# Altium PCB Motor-35.PcbDoc
Units mm, origin at the board's own origin, x right, y up, seen from the top; angles counter-clockwise.
Board outline 35.05 x 35.13 mm, 4 copper layers (Top1, Signal2, Gnd3, Bottom4), stack 0.778 mm thick; 73 components, 65 nets, 248 pads, 132 vias.
Unrouted connection lines stored in the file: 54.
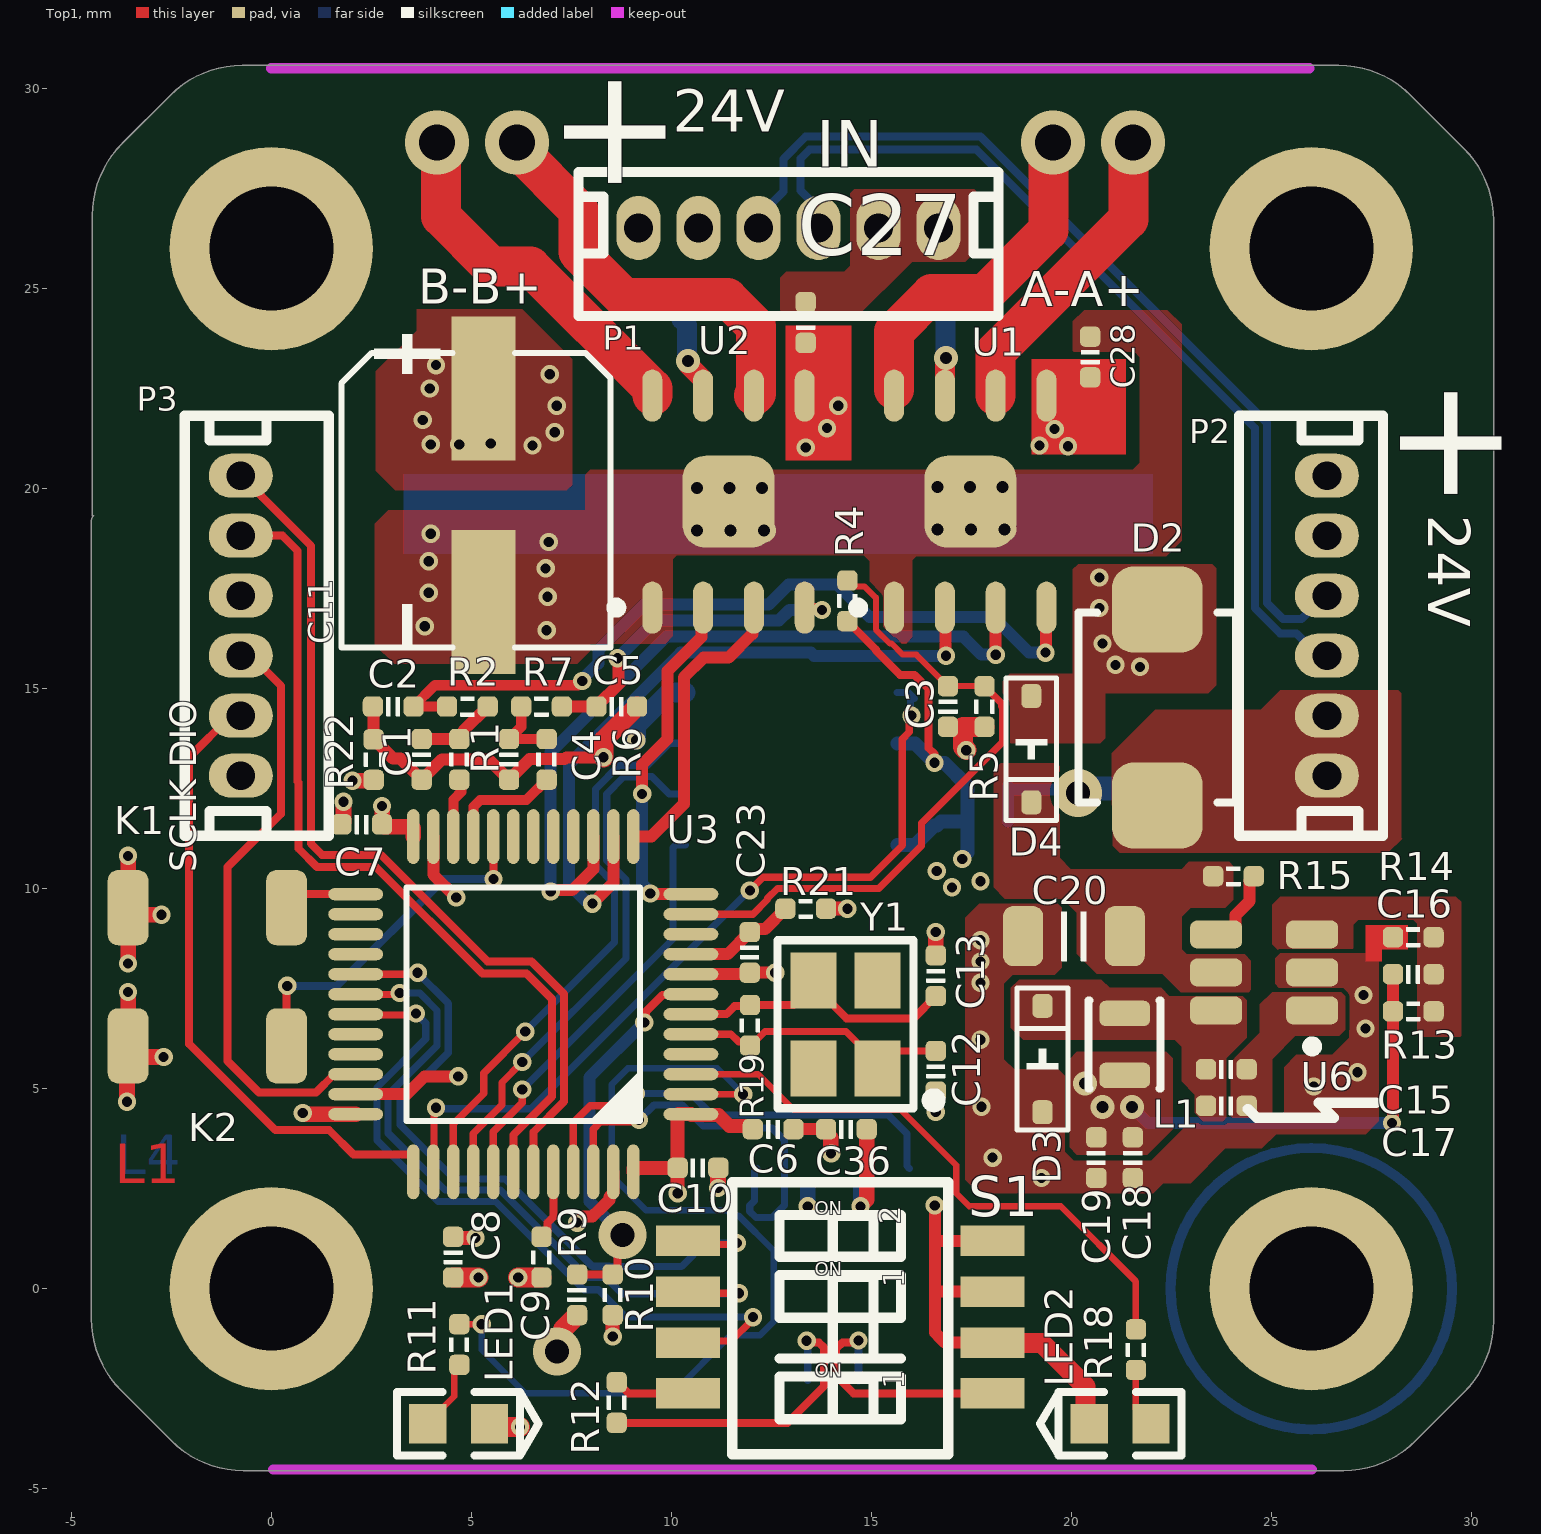
[diagram p0: Top1 view]
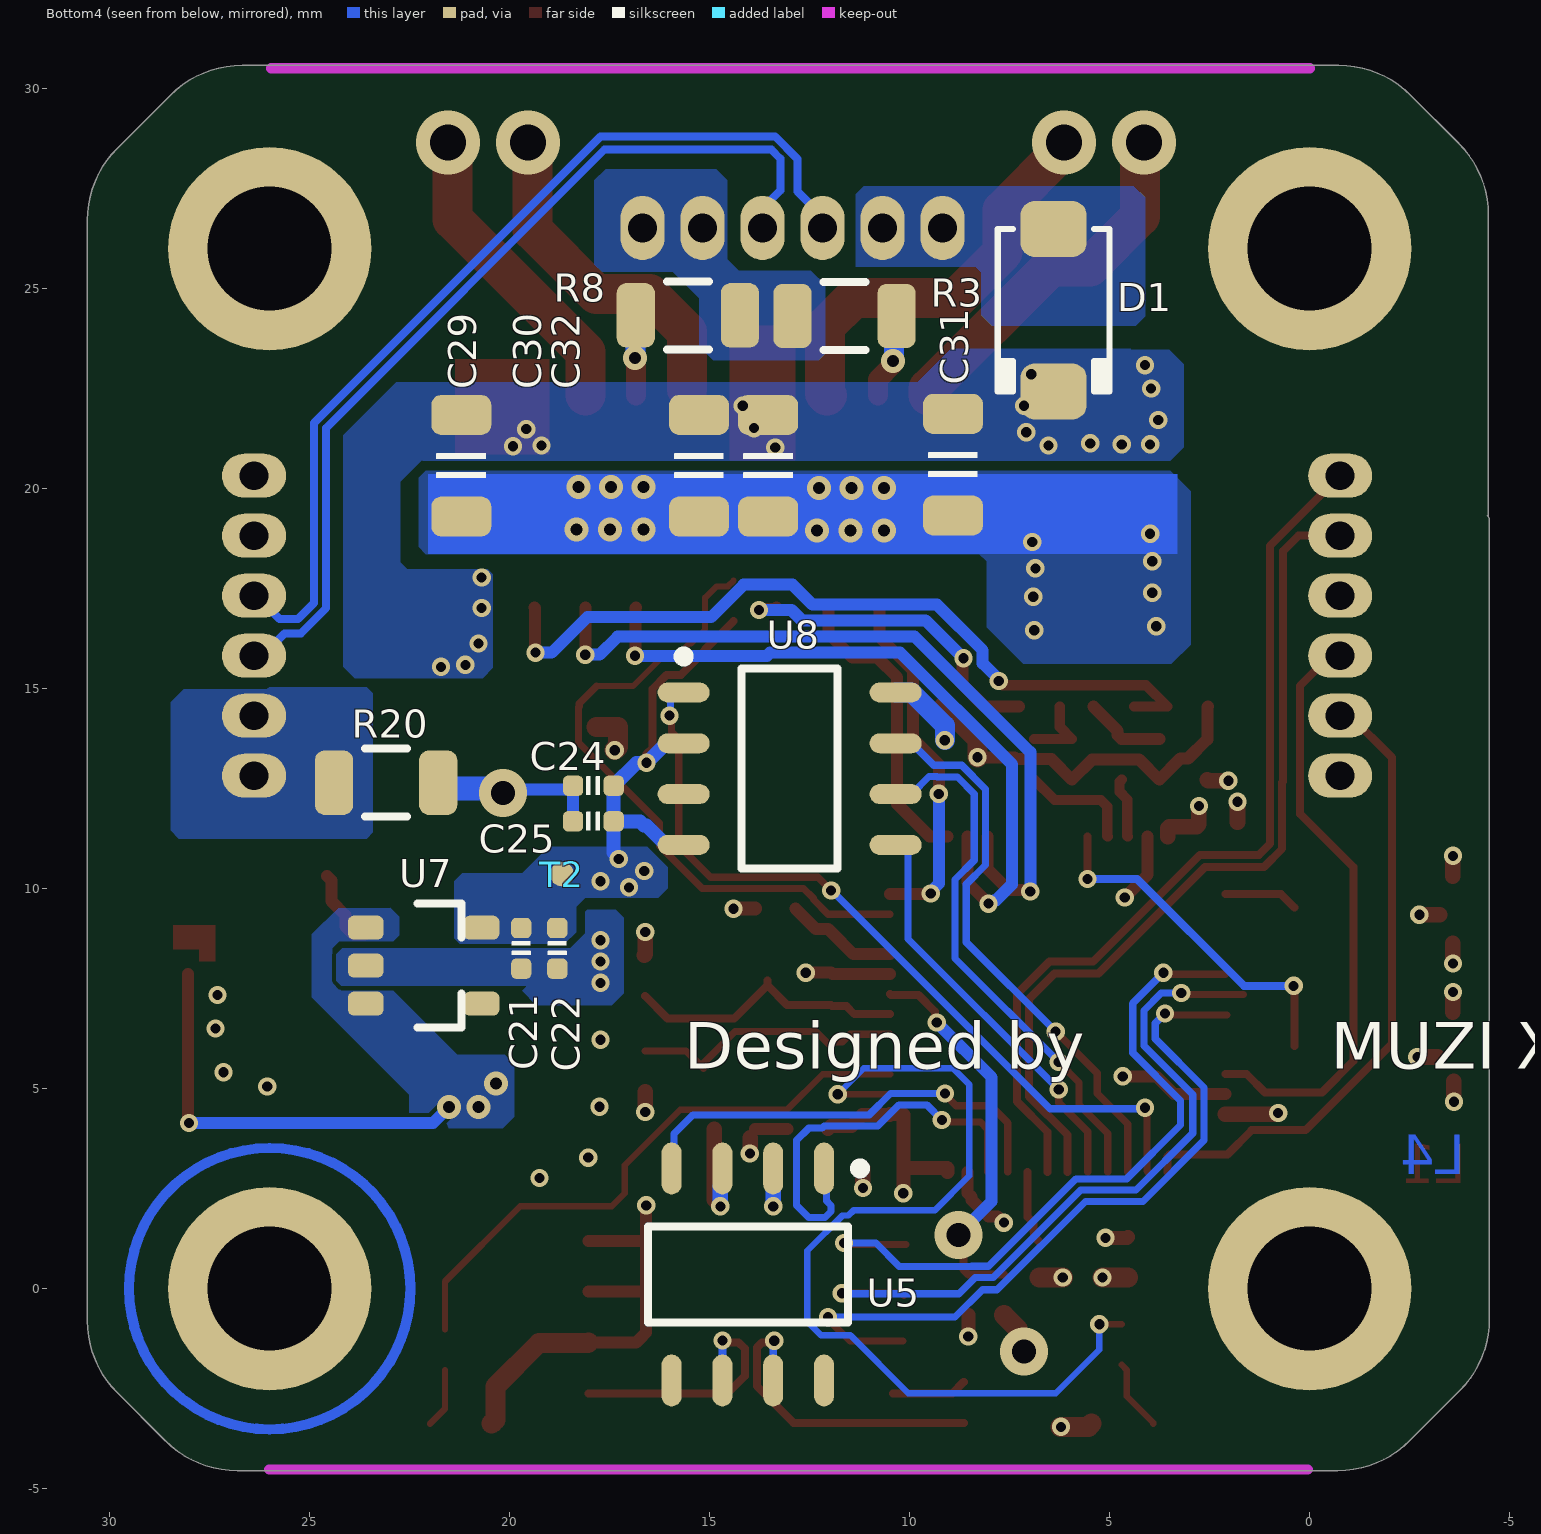
[diagram p1: Bottom4 view, seen from below]
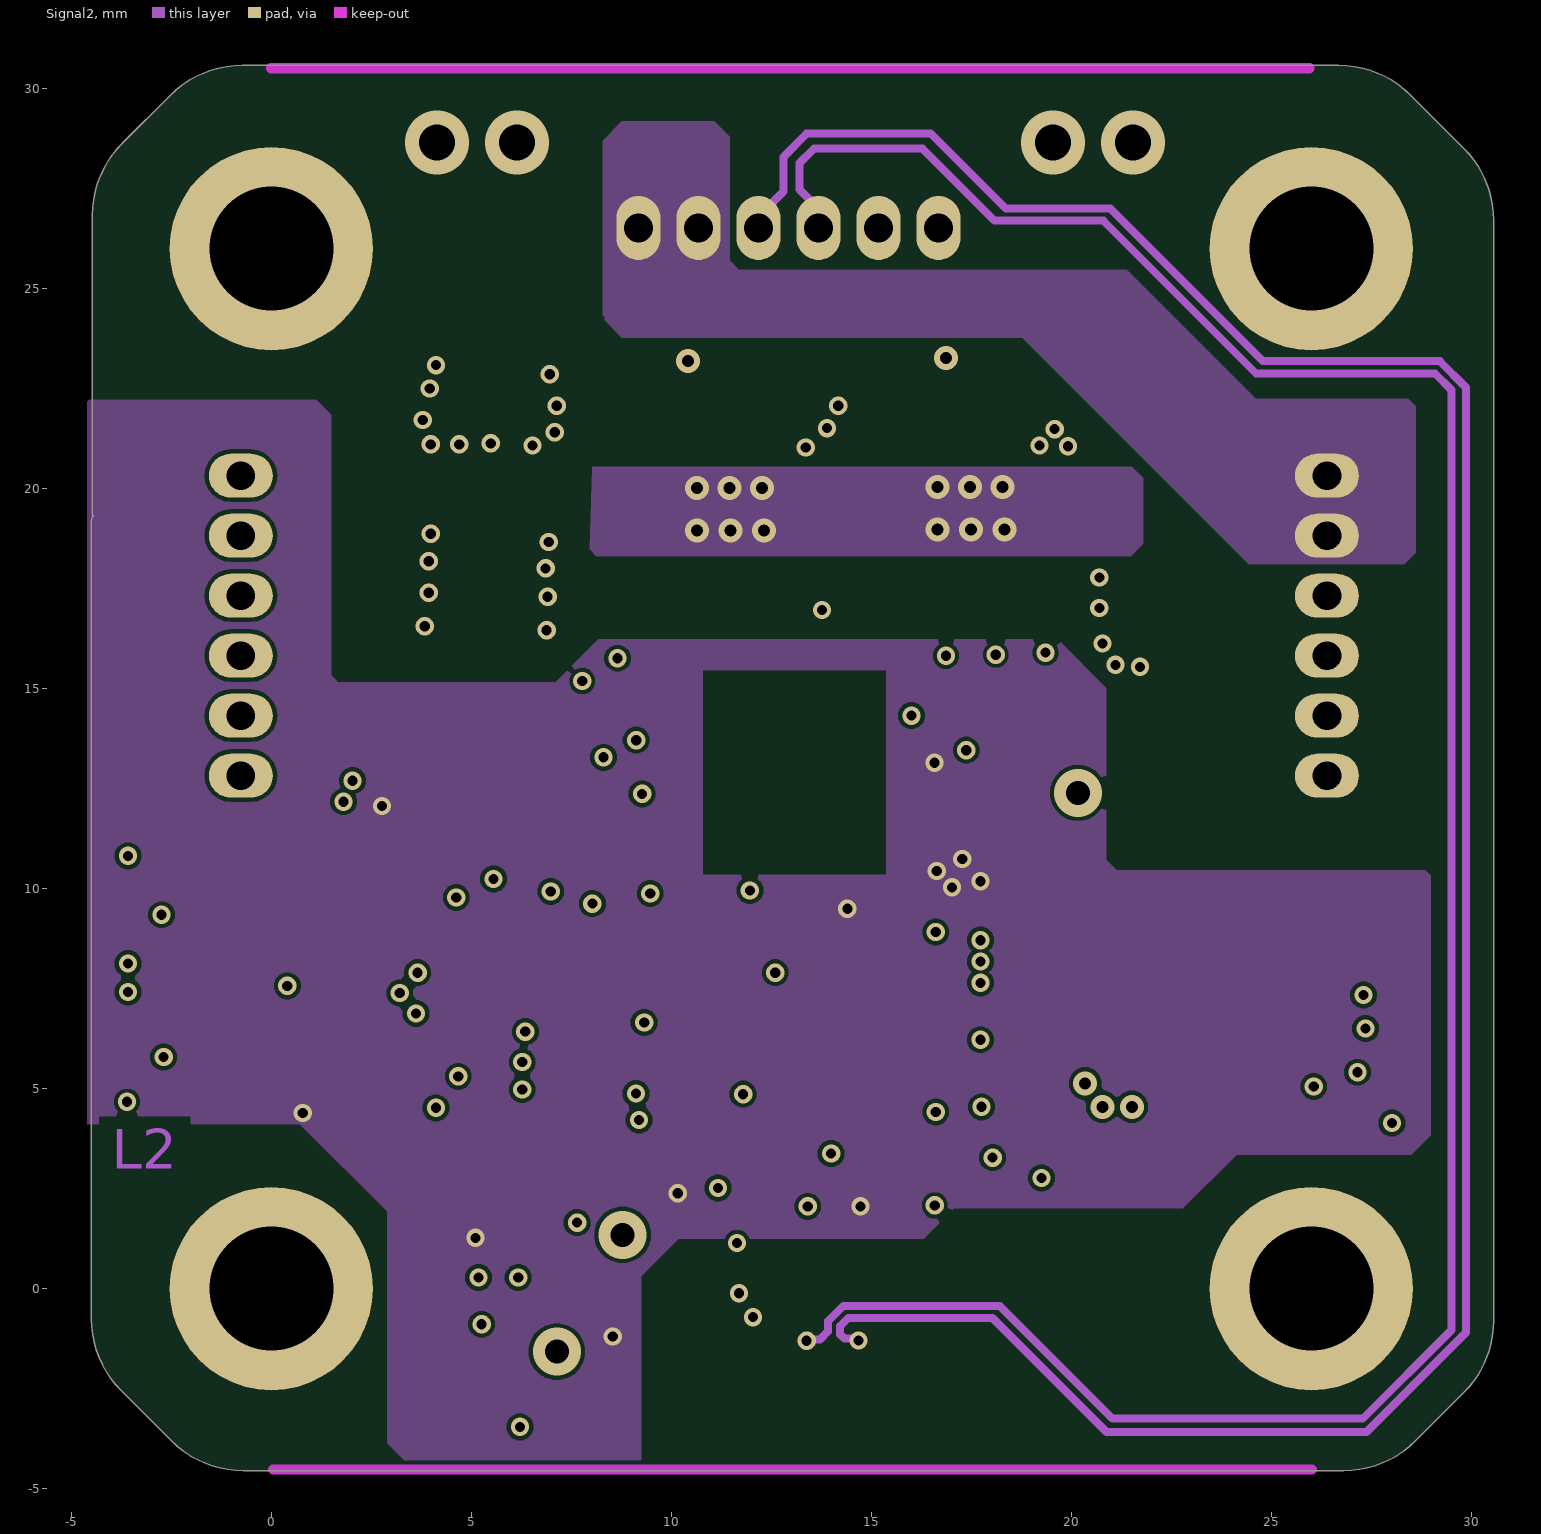
[diagram p2: Signal2]
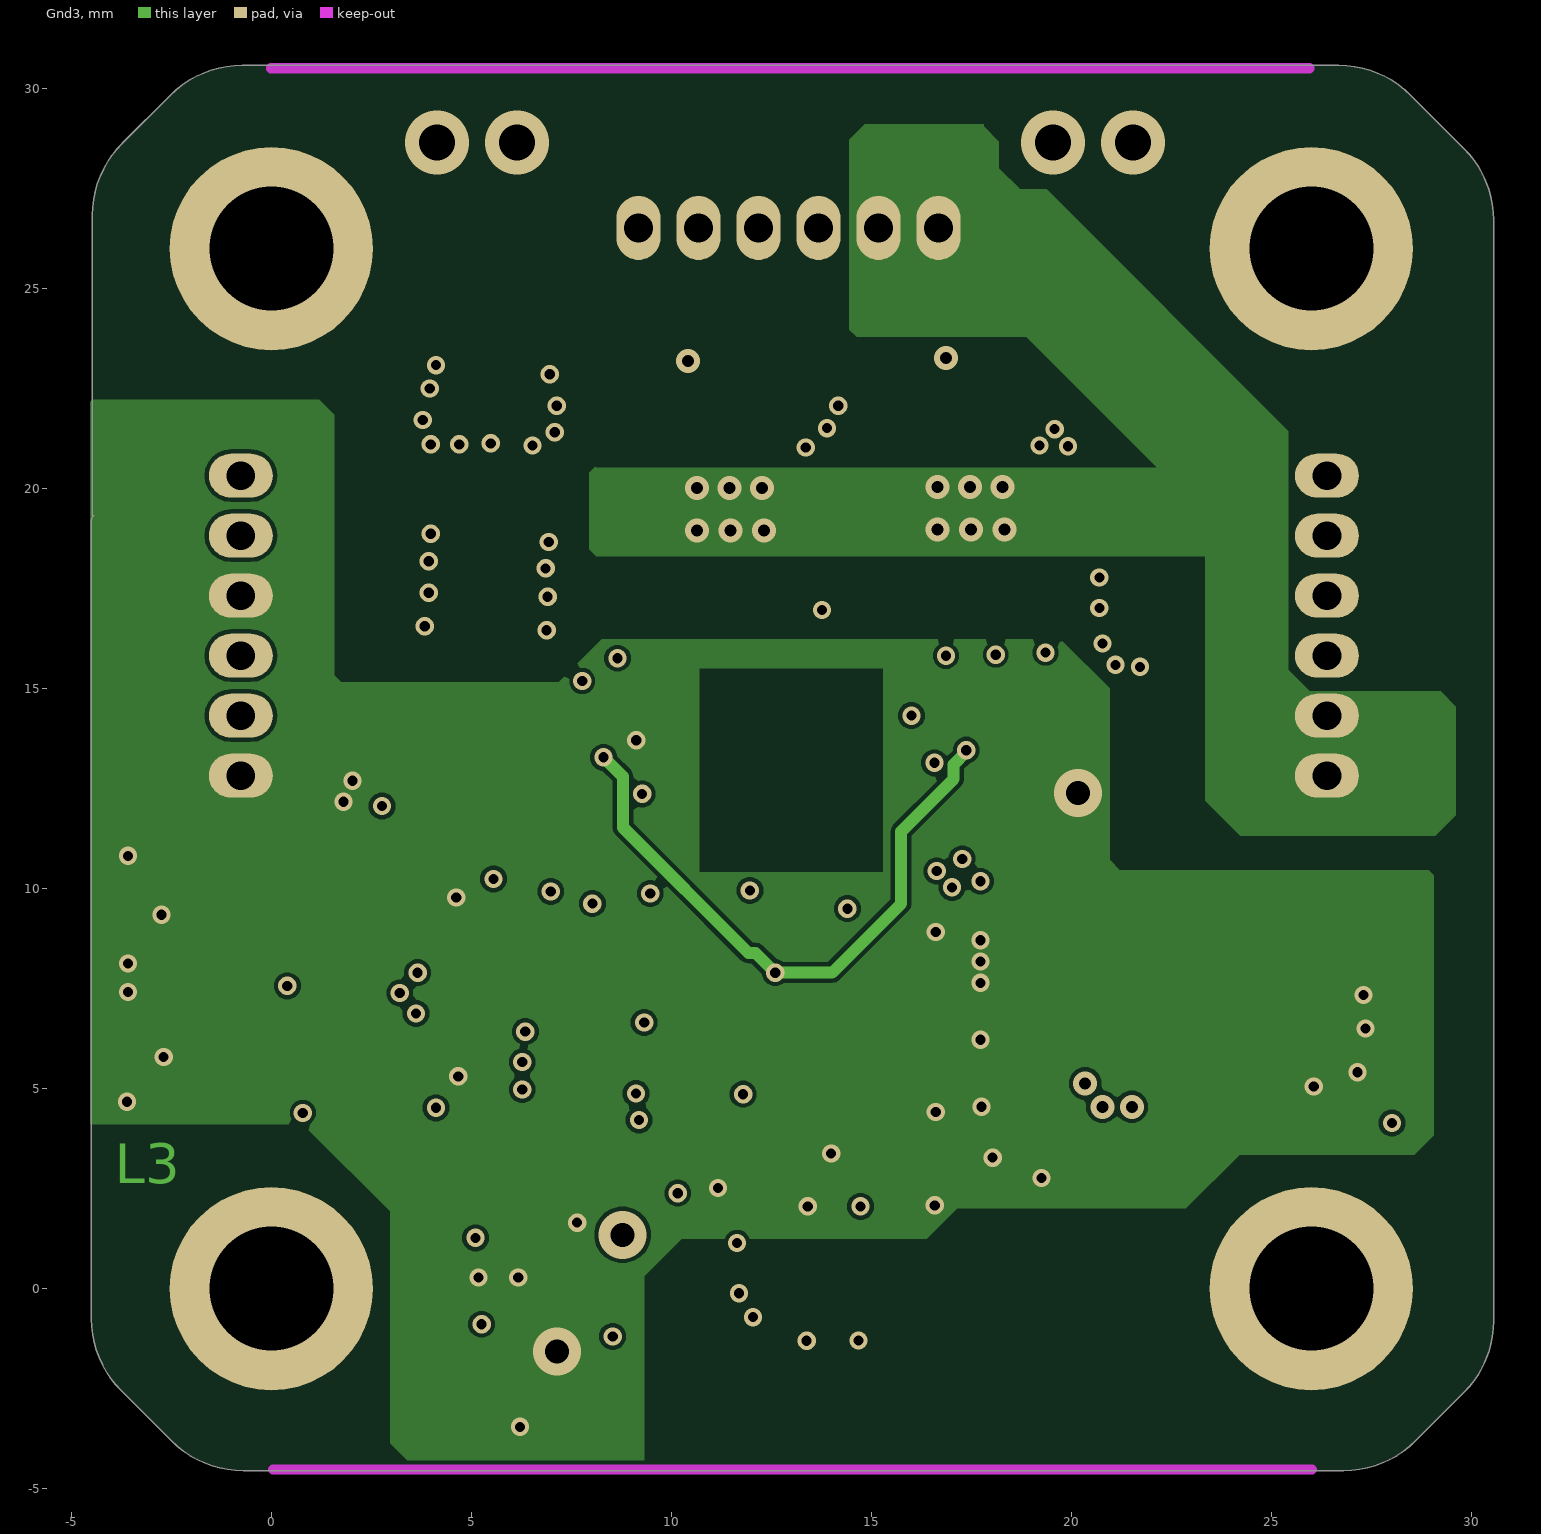
[diagram p3: Gnd3]
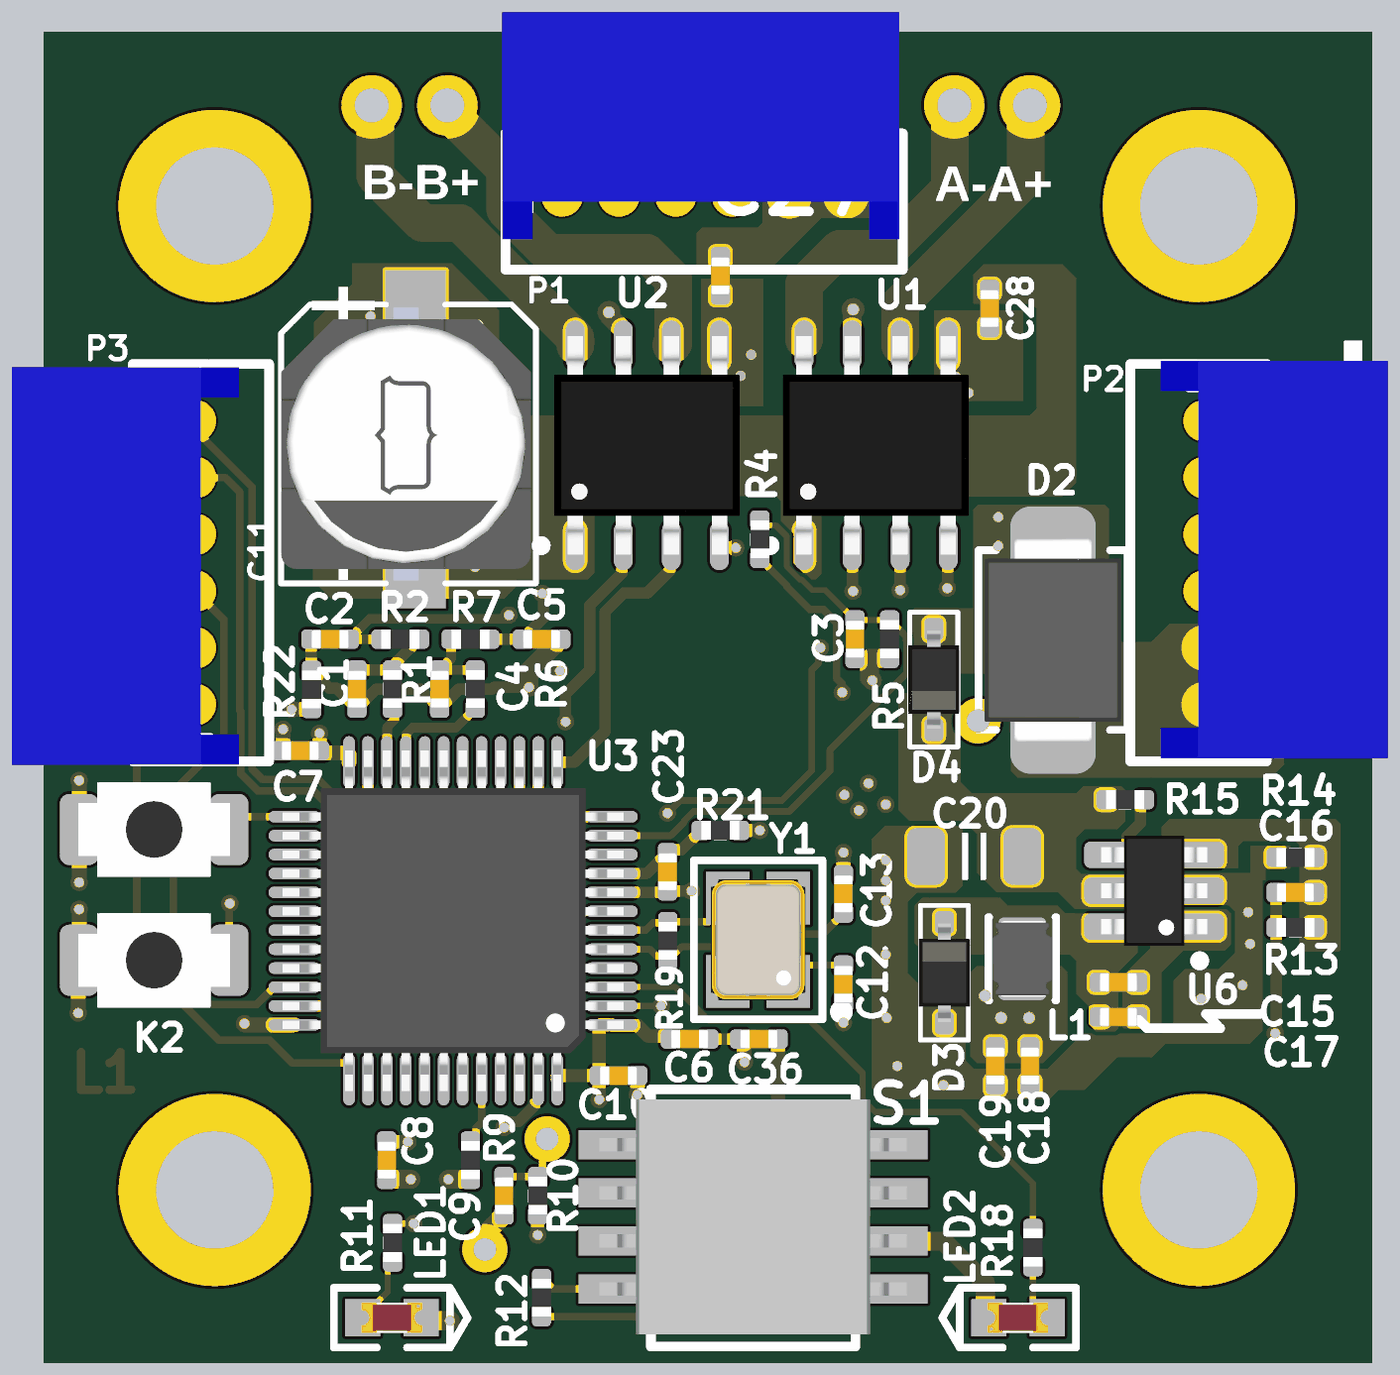
[diagram p4: 3D render of the assembled board from above, using the file's embedded part models]
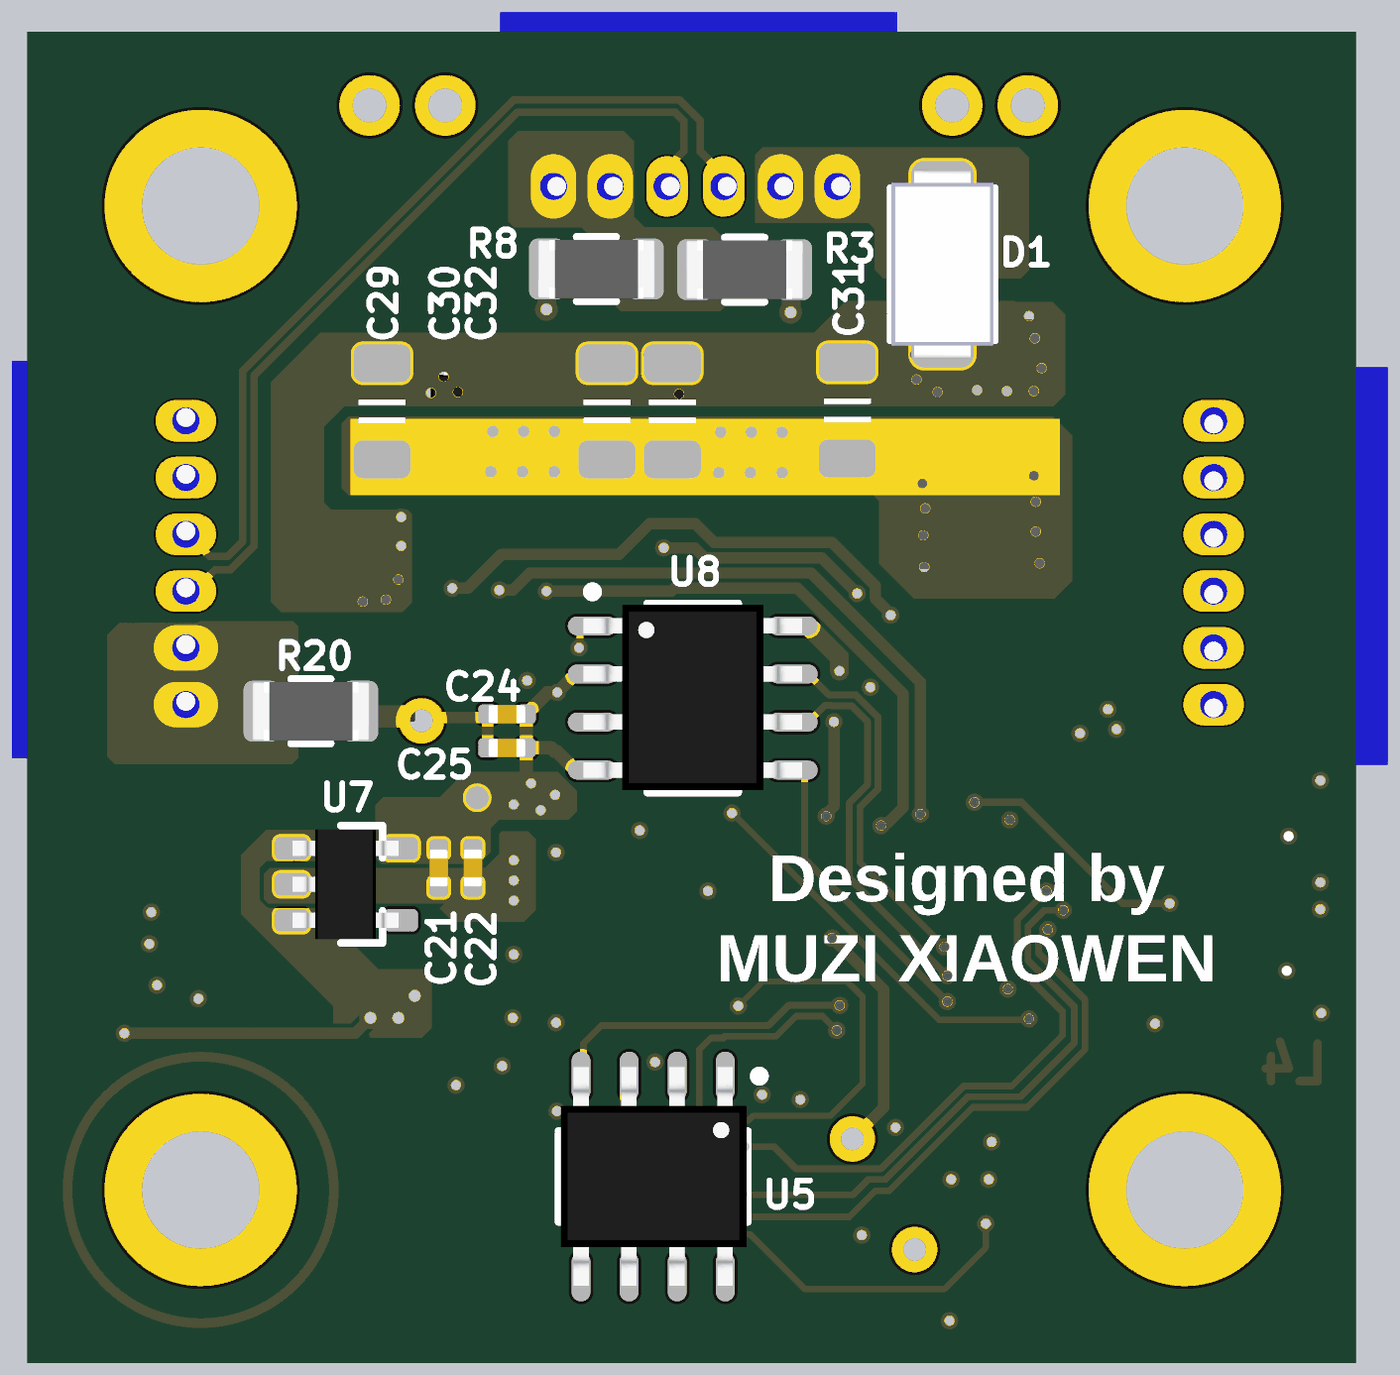
[diagram p5: 3D render of the assembled board from below, using the file's embedded part models]

## Layer stack, top to bottom
Top Solder: solder mask 0.0102, Solder Resist, Dk 3.5
Top1: signal copper 0.0356
Dielectric1: core 0.254, FR-4, Dk 4.2
Signal2: signal copper 0.036
Dielectric2: core 0.254, Dk 4.2
Gnd3: signal copper 0.036
Dielectric3: prepreg 0.127, Dk 4.2
Bottom4: signal copper 0.0356
Bottom Solder: solder mask 0.0102, Solder Resist, Dk 3.5

## Board outline
-4.47,19.329 -4.47,26.837 cw(c-1.93,26.837) -3.726,28.633 -2.522,29.838 cw(c-0.726,28.042) -0.726,30.582 26.685,30.582 cw(c26.685,28.042) 28.481,29.838 29.812,28.506 cw(c28.016,26.71) 30.556,26.71 30.556,-0.802 cw(c28.016,-0.802) 29.812,-2.598 28.608,-3.803 cw(c26.812,-2.007) 26.812,-4.547 -0.7,-4.547 cw(c-0.7,-2.007) -2.497,-3.803 -3.752,-2.547 cw(c-1.956,-0.751) -4.496,-0.751 -4.496,19.207 cw(c-4.322,19.207) -4.445,19.329

## Design rules (kind name [scope] priority, off if disabled: settings)
Clearance [All] p1: gap=0.102 ignorepadtopadclearanceinfootprint=FALSE except(0: Arc-Hole Track-Hole SMDPad-Hole THPad-Hole Via-Hole Fill-Hole Poly-Hole Region-Hole Text-Hole)
ComponentClearance [All] p1: gap=0 collisioncheckmode=3 verticalgap=0 showdistances=FALSE
DiffPairsRouting [All] p1: maxlimit=0.229 minlimit=0.229 mostfreqgap=0.229 toplayer_minwidth=0.381 toplayer_maxwidth=0.381 toplayer_prefwidth=0.381 midlayer1_minwidth=0.381 midlayer1_maxwidth=0.381 midlayer1_prefwidth=0.381 midlayer2_minwidth=0.381 midlayer2_maxwidth=0.381 midlayer2_prefwidth=0.381 bottomlayer_minwidth=0.381 bottomlayer_maxwidth=0.381 bottomlayer_prefwidth=0.381 maxuncoupledlength=12.7
FanoutControl Fanout_BGA [All] p1: bgadir=Out bgaviamode=Centered fanoutstyle=Auto fanoutdirection=Alternating viagrid=0.025 // Fanout_BGA (Default Rule)
HoleSize [All] p1: absolutevalues=TRUE maxlimit=254 minlimit=0.203 maxpercent=80.000 minpercent=20.000
MinimumSolderMaskSliver [All] p1 off: minsoldermaskwidth=0.051
PlaneClearance [All] p1: clearance=0.203
PlaneConnect [All] p1: planeconnectstyle=Direct reliefexpansion=0.508 reliefentries=4 reliefconductorwidth=0.254 reliefairgap=0.254
PolygonConnect [All] p1: connectstyle=Direct reliefconductorwidth=0.254 reliefentries=4 polygonreliefangle="90 Angle" airgapwidth=0.254
RoomDefinition Port [InComponentClass('Port')] p1 off: confinementstyle=ConfineIn formatcopy=TRUE lockcomponents=FALSE outline -13.335,-36.017 37.465,-36.017 37.465,-10.617 -13.335,-10.617
RoomDefinition MCU [InComponentClass('MCU')] p2 off: confinementstyle=ConfineIn formatcopy=TRUE lockcomponents=FALSE outline -13.233,-36.17 37.567,-36.17 37.567,-10.77 -13.233,-10.77
RoomDefinition Interface [InComponentClass('Interface')] p3 off: confinementstyle=ConfineIn formatcopy=TRUE lockcomponents=FALSE outline -14.453,-36.5 36.347,-36.5 36.347,-11.1 -14.453,-11.1
RoomDefinition Drive [InComponentClass('Drive')] p4 off: confinementstyle=ConfineIn formatcopy=TRUE lockcomponents=FALSE outline -13.005,-36.5 37.795,-36.5 37.795,-11.1 -13.005,-11.1
RoomDefinition Power [InComponentClass('Power')] p5 off: confinementstyle=ConfineIn formatcopy=TRUE lockcomponents=FALSE outline -12.675,-36.144 38.125,-36.144 38.125,-10.744 -12.675,-10.744
RoutingVias [All] p1: holewidth=0.203 width=0.406 viastyle="Through Hole" minholewidth=0.152 minwidth=0.305 maxholewidth=0.711 maxwidth=1.27
SilkToSilkClearance [All] p1: silktosilkclearance=0
SilkToSolderMaskClearance [IsPad] p1: minsilkscreentomaskgap=0 clearancetoexposedcopper=TRUE
SolderMaskExpansion [All] p1: expansion=0.076 istentingtop=FALSE
Width GND [(InNet('AGND') OR InNet('GND'))] p1: maxlimit=1.27 minlimit=0.102 preferedwidth=0.254
Width VCC [(InNet('VDD_SYS_3.3V') OR InNet('VDD_AV_3.3V') OR InNet('VDD_5V') OR InNet('VDD1V2-SYS') OR InNet('VDD1V1-EPHY') OR InNet('VDD-CPUX') OR InNet('VDD-CPUS') OR InNet('VDD-CPUFB') OR InNet('VCC-DRAM'))] p2: maxlimit=1.27 minlimit=0.102 preferedwidth=0.254
Width [All] p3: maxlimit=254 minlimit=0.102 preferedwidth=0.102
21 further rules are at their usual default settings.

## Classes and differential pairs
component class Port: C36 K1 K2 P1 P2 P3 R12 S1 U5
component class MCU: C6 C7 C8 C9 C10 C12 C13 C23 LED1 LED2 R9 R10 R11 R18 R19 R21 R22 U3 Y1
component class Interface: C24 C25 U8
component class Drive: C1 C2 C3 C4 C5 C27 C28 R1 R2 R3 R4 R5 R6 R7 R8 R20 U1 U2
component class Power: C11 C15 C16 C17 C18 C19 C20 C21 C22 C29 C30 C31 C32 D1 D2 D3 D4 L1 R13 R14 R15 T2 U6 U7

## Components (designator, comment, footprint, x,y, rotation, side; value= is the part's Value field where it differs from the comment)
C1 "0.1uF" CAP_0402 3.759,13.233 r90 top value=0.1u
C2 "0.1uF" CAP_0402 3.048,14.554 r0 top value=0.1u
C3 "10uF" CAP_0402 16.916,14.554 r90 top value=0.1u
C4 "0.1uF" CAP_0402 5.944,13.233 r90 top value=0.1u
C5 "0.1uF" CAP_0402 8.636,14.554 r180 top value=0.1u
C6 "0.1uF" CAP_0402 12.548,3.988 r180 top value=0.1u
C7 "0.1uF" CAP_0402 2.261,11.608 r0 top value=0.1u
C8 "0.1uF" CAP_0402 4.547,0.787 r90 top value=0.1u
C9 "0.1uF" CAP_0402 7.645,-0.152 r90 top value=0.1u
C10 "10uF" CAP_0402 10.668,3.023 r180 top value=0.1u
C11 "220uF/25V" CAP-SMD_BD8.0-L8.3-W8.3-LS9.3-FD 5.309,19.964 r270 top locked value=150uF/35V
C12 "20pF" CAP_0402 16.612,5.436 r270 top
C13 "20pF" CAP_0402 16.612,7.823 r90 top
C15 "0.1uF" CAP_0402 23.876,5.486 r0 top value=0.1u
C16 "100pF" CAP_0402 28.55,7.861 r0 top value=0.1u
C17 "0.1uF" CAP_0402 23.876,4.572 r0 top value=0.1u
C18 "0.1uF" CAP_0402 21.539,3.277 r90 top value=0.1u
C19 "10uF" CAP_0402 20.625,3.277 r90 top value=0.1u
C20 "10uF/50V" 1206-CAP 20.066,8.814 r0 top value=0.1u
C21 "0.1uF" CAP_0402 19.71,8.509 r90 bottom value=0.1u
C22 "10uF" CAP_0402 18.809,8.509 r90 bottom value=0.1u
C23 "0.1uF" CAP_0402 11.963,8.407 r90 top value=0.1u
C24 "10uF" CAP_0402 17.907,12.573 r180 bottom value=0.1u
C25 "0.1uF" CAP_0402 17.907,11.684 r180 bottom value=0.1u
C27 "0.1uF" CAP_0402 13.36,24.155 r270 top value=0.1u
C28 "0.1uF" CAP_0402 20.472,23.292 r270 top value=0.1u
C29 "10uF/50V" 1206-CAP 21.209,20.574 r270 bottom
C30 "10uF/50V" 1206-CAP 15.265,20.574 r270 bottom
C31 "10uF/50V" 1206-CAP 8.915,20.599 r270 bottom
C32 "10uF/50V" 1206-CAP 13.538,20.574 r270 bottom
C36 "0.1uF" CAP_0402 14.376,3.988 r0 top value=0.1u
D1 "SS54" DO-214AC 6.401,24.46 r270 bottom
D2 "SMBJ28CA" SMBJ-CA_MFG 22.149,14.529 r90 top
D3 "二极管-5819W" SOD-323 19.279,5.74 r90 top
D4 "二极管-5819W" SOD-323 18.999,13.487 r270 top
K1 "TACT 2P" ButtonTACT_3x4x2_180 -1.6,9.525 r0 top value=3x4
K2 "TACT 2P" ButtonTACT_3x4x2_180 -1.6,6.071 r0 top value=3x4
L1 "6.8uH" IND-201612 21.336,6.108 r270 top
LED1 "LED GREEN" LED-0603 4.693,-3.423 r180 top
LED2 "LED GREEN" LED-0603 21.209,-3.327 r0 top
P1 "Header 6H" CONN-TH_HC-ZH1.5-6A-s 12.929,26.518 r0 top locked
P2 "Header 6H" CONN-TH_HC-ZH1.5-6A-s 26.391,16.574 r270 top
P3 "Header 6H" CONN-TH_HC-ZH1.5-6A-s -0.762,16.574 r90 top
R1 "1K" RES_0402 4.699,13.233 r90 top value=22R
R2 "1K" RES_0402 4.902,14.554 r180 top value=22R
R3 "0.1R" 1206-RES 15.545,24.333 r180 bottom value=22R
R4 "NCP15XH103F03RC" RES_0402 14.402,17.196 r270 top value=10k
R5 "3.3K" RES_0402 17.831,14.554 r90 top value=22R
R6 "1K" RES_0402 6.883,13.233 r90 top value=22R
R7 "1K" RES_0402 6.756,14.554 r0 top value=22R
R8 "0.1R" 1206-RES 11.627,24.318 r0 bottom value=22R
R9 "10K" RES_0402 6.756,0.787 r270 top value=22R
R10 "10K" RES_0402 8.534,-0.152 r270 top value=22R
R11 "1K" RES_0402 4.699,-1.397 r270 top value=22R
R12 "120R" RES_0402 8.636,-2.845 r90 top value=22R
R13 "10K" RES_0402 28.55,6.934 r180 top value=22R
R14 "1.8K" RES_0402 28.55,8.788 r0 top value=22R
R15 "1M" RES_0402 24.054,10.312 r0 top value=22R
R18 "1K" RES_0402 21.615,-1.524 r270 top value=22R
R19 "1M" RES_0402 11.969,6.585 r270 top value=22R
R20 "0R" 1206-RES 23.089,12.649 r0 bottom
R21 "0" RES_0402 13.36,9.5 r0 top value=0R
R22 "0" RES_0402 2.559,13.227 r90 top value=0R
S1 "DSHP04TSGER" SW-SMD_DSHP04TS-S 10.414,-0.076 r90 top
T2 "测试点" TEST_PT 18.694,10.363 r90 bottom
U1 "TB67H450FNG" SO-8-PAD 17.475,19.677 r0 top locked
U2 "TB67H450FNG" SO-8-PAD 11.43,19.677 r0 top locked
U3 "STM32F103CBT6" LQFP-48 6.299,7.112 r0 top locked
U5 "SN65HVD232D" so-8 14.046,0.356 r90 bottom
U6 "ME3116" SOT23-6 24.822,7.905 r90 top
U7 "LP2992 3V3" SOT23-5 22.098,8.077 r270 bottom
U8 "MT6816" SO-8 13,13 r180 bottom locked
Y1 "XTAL-4" LC-SMD-3225_4P 14.357,6.61 r90 top locked value="12 MHz"

## Footprints (in the part's own frame and the unit in brackets; to place one, negate y for a bottom-side part, rotate by r counter-clockwise, add the part's x,y. Pads: shape width x height; smd on the part's side, far side on the other; paste and mask are expansions set on the pad)
1206-CAP [mm]
  rrect50% 1x1.5 smd: 1(-1.27,0) 2(1.27,0)
  silkscreen extent -0.3,-0.61 0.3,0.61, body extent -1.5,-0.75 1.5,0.75, height 1.5
1206-RES [mm]
  rrect50% 0.956x1.61 smd paste+0 mask+0: 1(-1.301,0) 2(1.301,0)
  silkscreen extent -0.52,-0.85 0.52,0.85, body extent -1.55,-0.77 1.55,0.77, height 0.65
ButtonTACT_3x4x2_180 [mil]
  rrect50% 40x74 smd: 1(-78,0) 2(78,0)
  body extent -79,-49 79,49, height 63
CAP-SMD_BD8.0-L8.3-W8.3-LS9.3-FD [mm]
  rect 3.6x1.6 smd: 1(-2.54,0) 2(2.794,0)
  silkscreen extent -3.9,-3.56 3.94,3.18, body extent -3.35,-3.55 3.85,3.05, height 7.7
CAP_0402 [mil]
  rrect50% 20x20 smd: 1(-20,0) 2(20,0)
  silkscreen extent -7,-9 7,9, body extent -20,-10 20,10, height 20
CONN-TH_HC-ZH1.5-6A-s [mm]
  oval 1.1x1.6 hole 0.72 paste+0 mask+0.05: 1(-3.75,0) 2(-2.25,0) 3(-0.75,0) 4(0.75,0) 5(2.25,0) 6(3.75,0)
  silkscreen extent -5.25,-2.2 5.25,1.4, body extent -5.34,-1.4 5.16,4.6, height 4
DO-214AC [mil] "SMA"
  rrect50% 55x65 smd: 1(-80,0) 2(80,0)
  silkscreen extent -80,-55 80,55, body extent -98,-53 98,53, height 85
IND-201612 [mm]
  rrect50% 0.635x1.27 smd paste+0 mask+0: 1(-0.774,0) 2(0.774,0)
  silkscreen extent -1.1,-0.9 1.1,0.9, body extent -1,-0.8 1,0.8, height 0.95
LC-SMD-3225_4P [mm]
  rect 1.4x1.15 smd: 1(-1.1,-0.8) 2(1.1,-0.8) 3(1.1,0.8) 4(-1.1,0.8)
  silkscreen extent -2.1,-2.35 2.1,1.7, body extent -1.6,-1.25 1.6,1.25, height 0.61
LED-0603 [mm]
  rect 0.93x0.98 smd: A(0.782,-0.048) C(-0.758,-0.048)
  silkscreen extent -1.99,-0.84 1.55,0.74, body extent -0.79,-0.45 0.81,0.35, height 0.6
LQFP-48 [mil]
  oval 54x12 smd: 1(165,-108.27) 2(165,-88.58) 3(165,-68.9) 4(165,-49.21) 5(165,-29.53) 6(165,-9.84) 7(165,9.84) 8(165,29.53) 9(165,49.21) 10(165,68.9) 11(165,88.58) 12(165,108.27) 25(-165,108.27) 26(-165,88.58) 27(-165,68.9) 28(-165,49.21) 29(-165,29.53) 30(-165,9.84) 31(-165,-9.84) 32(-165,-29.53) 33(-165,-49.21) 34(-165,-68.9) 35(-165,-88.58) 36(-165,-108.27)
  oval 12x54 smd: 13(108.27,165) 14(88.58,165) 15(68.9,165) 16(49.21,165) 17(29.53,165) 18(9.84,165) 19(-9.84,165) 20(-29.53,165) 21(-49.21,165) 22(-68.9,165) 23(-88.58,165) 24(-108.27,165) 37(-108.27,-165) 38(-88.58,-165) 39(-68.9,-165) 40(-49.21,-165) 41(-29.53,-165) 42(-9.84,-165) 43(9.84,-165) 44(29.53,-165) 45(49.21,-165) 46(68.9,-165) 47(88.58,-165) 48(108.27,-165)
  silkscreen extent -115,-115 115,115, body extent -177,-177 177,177, height 61
RES_0402 [mil]
  rrect50% 20x20 smd: 1(-20,0) 2(20,0)
  silkscreen extent -7,-10 7,10, body extent -20,-10 20,10, height 14
SMBJ-CA_MFG [mm]
  rrect50% 2.16x2.26 smd paste+0 mask+0: 1(-2.45,0) 2(2.45,0)
  silkscreen extent -2.37,-1.97 2.37,1.97, body extent -2.7,-1.81 2.7,1.81, height 2.62
so-8 [mm]
  oval 1.3x0.5 smd: 1(2.65,-1.905) 2(2.65,-0.635) 3(2.65,0.635) 4(2.65,1.905) 5(-2.65,1.905) 6(-2.65,0.635) 7(-2.65,-0.635) 8(-2.65,-1.905)
  silkscreen extent -1.2,-2.93 2.77,2.5, body extent -2.89,-2.46 2.89,2.44, height 1.45
SO-8 [mm]
  oval 1.3x0.5 smd: 1(-2.65,1.905) 2(-2.65,0.635) 3(-2.65,-0.635) 4(-2.65,-1.905) 5(2.65,-1.905) 6(2.65,-0.635) 7(2.65,0.635) 8(2.65,1.905)
  silkscreen extent -2.78,-2.5 1.2,2.93, body extent -2.89,-2.44 2.89,2.46, height 1.45
SO-8-PAD [mm]
  oval 0.5x1.3 smd: 1(-1.905,-2.65) 2(-0.635,-2.65) 3(0.635,-2.65) 4(1.905,-2.65) 5(1.905,2.65) 6(0.635,2.65) 7(-0.635,2.65) 8(-1.905,2.65)
  rrect50% 2.3x2.3 smd: 9(0,0)
  silkscreen extent -2.93,-2.77 -2.68,-2.53, body extent -2.46,-2.89 2.44,2.89, height 1.45
SOD-323 [mm]
  rrect50% 0.6x0.5 smd: 1(-1.329,0) 2(1.329,0)
  silkscreen extent -1.78,-0.64 1.78,0.64, body extent -1.3,-0.68 1.3,0.67, height 1.15
SOT23-5 [mm] "SOT23, 3-Leads, Body 3.1x3.0mm (max), Pitch 0.95mm, IPC Medium Density"
  rrect50% 0.6x0.889 smd: 1(-0.95,-1.5) 2(0,-1.5) 3(0.95,-1.5) 4(0.95,1.396) 5(-0.95,1.396)
  silkscreen extent -1.55,-0.2 1.55,0.9, body extent -1.45,-1.48 1.45,1.32, height 1.2
SOT23-6 [mm]
  rrect50% 0.7x1.3 smd: 1(-0.95,-1.2) 2(0,-1.2) 3(0.95,-1.2) 4(0.95,1.2) 5(0,1.2) 6(-0.95,1.2)
  silkscreen extent -1.97,-1.33 -1.73,-1.08, body extent -1.45,-1.4 1.45,1.4, height 1.45
SW-SMD_DSHP04TS-S [mm]
  rect 0.762x1.6 smd: 1(1.27,0) 2(0,0) 3(-1.27,0) 4(-2.54,0) 5(-2.54,-7.62) 6(-1.27,-7.62) 7(0,-7.62) 8(1.27,-7.62)
  silkscreen extent -4.06,-6.51 2.73,-1.11, body extent -3.73,-7.87 2.46,0.25, height 1.71
TEST_PT [mm]
  rrect100% 0.606x0.606 smd: 0(0,0)

## Part data
C1 C2 C3 C4 C5 C6 C7 C8 C9 C10 C12 C13 C15 C16 C17 C18 C19 C20 C21 C22 C23 C24 C25 C27 C28 C36: library part 电容-0402, "Capacitor"
C11 C29 C30 C31 C32: library part CAP, "Capacitor, chip, ceramic", Parameters="E22 CAP", PN=RVT1E221M0607, Price=0.038
D1: library part Diode_SMA, "Diode", Type=SMA
D3 D4: "40V"
K1 K2: library part ButtonTACT_3x4x2_180, "Button", Type="TACT 2P"
L1: library part 电感-201612
LED1 LED2: library part LED, "LED GRN SGL RA 25mA 4.1V SMD", AGILE_PN=370-76642, CAD_APPROVED=Yes, CLASS=IC, HEIGHT=4.25MM, MFG_NAME01=Kingbright, MFG_PN01=AA4040ZGS, PN=19-217/G7C-AN1P2/3T, RoHS=Yes
P1 P2 P3: "Header, 6-Pin, Right Angle", LatestRevisionDate=17-Jul-2002, LatestRevisionNote="Re-released for DXP Platform.", Publisher="Altium Limited"
R1 R2 R5 R6 R7 R9 R10 R11 R12 R13 R14 R15 R18 R19 R21 R22: library part 电阻-0402, "Resistor"
R3 R8 R20: library part 电阻-1206, "Resistor"
R4: "THERMISTOR 10K OHM NTC 0402 SMD"
S1: library part 218-4LPSTJ, "DIP Switches / SIP Switches 4 pos. low profile Btm Seal Tape J Bend", Manufacturer_Name=CTS, Mouser Part Number=774-218-4LPSTJ, Datasheet Link=https://www.ctscorp.com/wp-content/uploads/218.pdf, Geometry.Height=2.7mm, Manufacturer_Part_Number=218-4LPSTJ, Mouser Price/Stock=https://www.mouser.co.uk/ProductDetail/CTS-Electronic-Components/218-4LPSTJ?qs=qNzHFtQhdJ%2Frpuf7cnHHWA%3D%3D
U1 U2: "PWM Chopper Type DC Brushed Motor Driver"
U3: "ARM Cortex-M3 32-bit MCU, 128 KB Flash, 20 KB Internal RAM, 37 I/Os, 48-pin LQFP, -40 to 85 degC, Tray", I/Os (High Current)=37, Operating Frequency(F) (Processor speed) (MHz)=72, Supplier Part Number 1=497-6288-ND, Supply Voltage(Vcc) min (V)=2, A/D Converter="2x12-bit (10 Channel)", ComponentLink1Description="Manufacturer URL", ComponentLink1URL=http://www.st.com/web/en/home.html, ComponentLink2Description=Datasheet, ComponentLink2URL=http://www.st.com/st-web-ui/static/active/en/resource/technical/document/datasheet/CD00161566.pdf, ComponentLink3Description="Package Specification", ComponentLink3URL=http://www.st.com/st-web-ui/static/active/en/resource/technical/document/datasheet/DM00058181.pdf, Core="ARM Cortex-M3", DatasheetVersion="Rev. 16", FLASH Size (Prog) (kB)=128, Internal RAM Size (kB)=20, Mounting Technology="Surface Mount", PackageDescription="48-Pin Low Profile Quad Flat Package, 7 x 7 mm Body, 0.5 mm Pitch", PackageReference=LQFP48, PackageVersion="Rev. 6, 06/2013", Packing=Tray, PartNumber=STM32F103CBT6, Supplier 1=Digi-Key, Supplier 2=Farnell, Supplier 3=Newark, Supplier 4=Newark, Supplier 5=Mouser, Supplier Part Number 2=1606327, Supplier Part Number 3=11N8296, Supplier Part Number 4=57P1214, Supplier Part Number 5=511-STM32F103CBT6
U5: Manufacturer="Texas Instruments", Manufacturer Part Number=SN65HVD232DR, Operating Temperature="-40癈 ~ 85癈", Package / Case="8-SOIC (0.154\", 3.90mm Width)", Supplier Device Package=8-SOIC, Supplier Part Number 1=296-26344-2-ND, Voltage - Supply="3 V ~ 3.6 V", Category="Integrated Circuits (ICs)", ComponentLink1Description=http://www.ti.com/lit/ds/symlink/sn65hvd230.pdf, ComponentLink1URL=http://www.ti.com/lit/ds/symlink/sn65hvd230.pdf, Data Rate=1Mbps, Duplex=Half, Mounting Type="Surface Mount", Number of Drivers/Receivers=1/1, Packaging="Tape & Reel (TR)", Part Status=Active, Pricing 1="2500=0.84375 (USD)", Pricing 2="1=2.05, 10=1.842, 100=1.4809, 500=1.21668, 1000=1.00811 (USD)", Protocol=CAN, RoHS="RoHS Compliant", Stock=5000, Supplier 1=Digi-Key, Supplier 2=Digi-Key, Supplier Part Number 2=296-26344-1-ND, Type=Transceiver
U6: "DC-DC"
U7: library part LP2992, "LDO"
U8: "Magnetic Position Sensor"
Y1: "Crystal", Distributors=Comet, Parameters="20ppm 20pF -20/+70C", Price=0.238

## Free pads (board coordinates)
  round 5.08 hole 3.1: ""(0,0) ""(0,26) ""(26,0) ""(26,26)

## Via types
v1: diameter 0.457, hole 0.254, Top1 to Bottom4, tented top, 108 vias
v2: diameter 0.6, hole 0.3, Top1 to Bottom4, tented both sides, 17 vias
v3: diameter 1.6, hole 0.9, Top1 to Bottom4, 4 vias
v4: diameter 1.2, hole 0.6, Top1 to Bottom4, 3 vias

## Nets (pads, with @x,y where several pads share a name; then routed paths per layer and width w, separated by ;. In a path a pad name is that pad's centre, name@x,y a point inside that pad or via, vN(x,y) a via of type N, cw(c..) or ccw(c..) an arc to the next point about the centre after c; other vN are vias at no path point)
ADC_ENC: U3.16
AGND: C1.1 C2.1 C3.1 C4.1 C5.1 C23.1 R5.1 R22.2 U3.8 | length 28.2
  Top1 w0.3: C2.1 2.55,14.544 2.55,13.745 R22.2 3.041,13.254 3.231,13.254 C1.1 4.265,13.231 5.438,13.231 C4.1 6.454,13.236 7.334,13.236 7.383,13.284 v1(8.306,13.284) ; U3.8 10.491,7.863 11.927,7.863 C23.1 v1(12.598,7.899)
  Top1 w0.5: v1(8.306,13.284) 8.306,13.716 C5.1 ; v1(17.374,13.462) 17.297,13.538 17.297,14.046 R5.1
  Gnd3 w0.3: v1(8.306,13.284) 8.791,12.799 8.791,11.529 11.924,8.396 12.101,8.396 v1(12.598,7.899) 14.021,7.899 15.748,9.627 15.748,11.43 17.059,12.741 17.059,13.105 17.374,13.42 v1(17.374,13.462)
BUTTON_1: K1.2 U3.25 | length 1.9
  Top1 w0.2: K1.2 0.718,9.862 U3.25
BUTTON_2: K2.2 U3.20 | length 8.8
  Top1 w0.2: K2.2 0.381,7.552 v1(0.4,7.571) ; U3.20 5.549,10.25 v1@5.563,10.236
  Bottom4 w0.2: v1(0.4,7.571) 1.642,7.571 4.314,10.243 v1(5.556,10.243)
CAN_H: P1.4 P2.4 R12.1 U5.7 | length 94.4
  Top1 w0.2: R12.1 12.903,-3.353 13.818,-2.438 13.818,-1.473 13.689,-1.344 13.427,-1.344 v1(13.384,-1.301)
  Signal2 w0.2: v1(13.384,-1.301) 13.415,-1.27 13.716,-1.27 13.919,-1.067 13.919,-0.813 14.3,-0.432 18.212,-0.432 21.031,-3.251 27.285,-3.251 29.505,-1.031 29.505,22.469 29.088,22.885 24.613,22.885 20.799,26.699 18.082,26.699 16.281,28.499 13.564,28.499 13.208,28.143 13.208,27.482 13.679,27.011 P1.4
  Gnd3 w0.2: P1.4@13.679,26.15 P1.4
  Bottom4 w0.18: v1(13.384,-1.301) 13.411,-1.328 U5.7
  Bottom4 w0.2: P1.4 13.679,27.011 13.233,27.456 13.233,28.25 13.457,28.473 17.633,28.473 24.587,21.519 24.587,17.018 25.222,16.383 25.629,16.383 26.187,15.824 P2.4
CAN_L: P1.3 P2.3 S1.5 U5.6 | length 94.7
  Top1 w0.2: v1(14.681,-1.295) 14.632,-1.345 14.276,-1.345 14.122,-1.499 14.122,-2.184 14.554,-2.616 S1.5
  Signal2 w0.2: P1.3 12.179,26.809 12.802,27.432 12.802,28.296 13.386,28.88 16.485,28.88 18.364,27 20.98,27 24.794,23.187 29.213,23.187 29.87,22.53 29.87,-1.092 27.381,-3.581 20.879,-3.581 18.031,-0.733 14.425,-0.733 14.221,-0.938 14.221,-1.14 14.327,-1.246 14.632,-1.246 v1(14.681,-1.295)
  Gnd3 w0.2: P1.3@12.179,26.226 P1.3
  Bottom4 w0.2: P1.3 12.179,26.809 12.802,27.432 12.802,28.245 13.36,28.804 17.729,28.804 24.892,21.641 24.892,17.14 25.293,16.739 25.756,16.739 26.341,17.324 P2.3 ; U5.6 v1(14.681,-1.295)
CAN_RX: U3.45 U5.4 | length 11.1
  Top1 w0.18: U3.45 7.549,4.146 7.976,4.572 8.839,4.572 v1@9.068,4.801
  Bottom4 w0.18: v1(9.119,4.877) 10.477,4.877 11.008,4.346 15.416,4.346 15.89,3.871 15.89,3.067 U5.4
CAN_TX: U3.46 U5.1 | length 10.2
  Top1 w0.18: U3.46 8.049,3.985 8.23,4.166 v1@9.119,4.166
  Bottom4 w0.18: v1(9.195,4.216) 9.574,4.595 10.264,4.595 10.795,4.064 12.141,4.064 12.192,4.013 12.522,4.013 12.827,3.708 12.827,2.083 12.522,1.778 12.116,1.778 11.963,1.93 11.963,2.08 12.08,2.196 12.08,2.944 U5.1
GND: C6.1 C7.1 C8.1 C9.1 C10.1 C12.2 C13.2 C18.1 C19.1 C20.1 C21.1 C22.1 C24.1 C25.1 C36.1 D3.1 K1.1 K2.1 LED1.C LED2.C P3.1 P3.4 R9.2 R14.1 R20.1 R22.1 S1.6 S1.7 S1.8 U3.23 U3.35 U3.47 U5.2 U6.2 U7.2 U8.8 | length 34.5
  Top1 w0.3: U3.35 3.389,4.862 3.835,5.309 v1(4.674,5.309) ; U3.23 U3.23 4.05,10.352 v1(4.623,9.779) ; v1(7.645,1.651) 7.798,1.803 8.026,1.803 8.207,1.984 8.217,1.984 8.453,2.22 8.453,2.29 8.549,2.386 U3.47 ; C6.1 C36.1 ; v1(16.586,2.083) 16.586,1.159 ; S1.6 16.839,-1.346 16.725,-1.232 16.586,-1.093 16.586,-0.178 ; S1.7 16.688,-0.076 16.586,-0.178 ; S1.8 16.621,1.194 16.586,1.159 ; 16.586,-0.178 16.586,1.159
  Top1 w0.39: v1(-3.607,4.674) K2.1@-3.607,5.182 ; K2.1@-3.581,6.909 v1(-3.581,7.417) ; v1(-3.581,8.128) K1.1@-3.581,8.636 ; K1.1@-3.581,10.312 v1(-3.581,10.82) ; K1.1@-3.251,9.347 v1(-2.743,9.347) ; K2.1@-3.2,5.791 v1(-2.692,5.791) ; C7.1@1.804,11.666 v1(1.804,12.174) ; v1(2.032,12.7) 2.54,12.7 R22.1 ; v1(11.168,2.519) C10.1@11.168,3.027 ; C36.1@13.983,3.772 13.983,3.391 v1(13.995,3.378) ; v1(16.612,4.42) C12.2 ; v1(16.612,8.915) 16.612,8.357 C13.2@16.637,8.331
  Top1 w0.5: C8.1 v1(5.182,0.279) ; LED1.C 5.531,-3.454 v1@6.223,-3.454 ; v1(6.172,0.279) R9.2 ; v4@7.29,-1.422 7.29,-1.016 C9.1 ; S1.6 18.045,-1.357 19.264,-1.357 20.359,-2.452 20.359,-3.283 LED2.C
  Bottom4 w0.3: C25.1 C24.1 18.504,12.484 20.079,12.484 v4(20.168,12.395)
  Bottom4 w0.39: v1(13.411,2.057) U5.2@13.411,2.565
  Bottom4 w0.5: v1(9.122,13.712) 9.122,14.077 9.95,14.905 U8.8
  Bottom4 w0.6: v4(20.168,12.395) 20.282,12.51 21.738,12.51 R20.1@21.814,12.434
  other v1: 6.217,-3.454 19.253,2.769 18.034,3.277 17.755,4.547 26.06,5.055 27.153,5.41 17.729,6.223 27.356,6.502 27.305,7.341 17.729,7.645 17.729,8.179 17.729,8.712
  other v4: 7.137,-1.575
ID0: S1.1 U3.29 | length 17.8
  Top1 w0.18: U3.29 3.62,7.862 v1(3.658,7.899) ; S1.1@10.094,1.104 v1@11.606,1.104
  Bottom4 w0.18: v1(3.658,7.899) 4.424,7.133 4.424,5.897 3.226,4.699 3.226,4.089 4.57,2.745 5.84,2.745 8.026,0.559 8.451,0.559 8.454,0.555 10.258,0.555 10.844,1.142 v1(11.644,1.142)
ID1: S1.2 U3.30 | length 18.2
  Top1 w0.18: U3.30@1.661,7.353 v1@3.173,7.353 ; S1.2@10.145,-0.166 10.198,-0.113 v1(11.694,-0.113)
  Bottom4 w0.18: v1(3.211,7.39) 3.71,7.39 4.142,6.957 4.142,6.073 2.921,4.851 2.921,3.886 4.343,2.464 5.723,2.464 7.91,0.277 8.359,0.277 8.764,-0.128 11.679,-0.128 v1(11.694,-0.113)
ID2: S1.3 U3.31 | length 18.7
  Top1 w0.18: U3.31@2.068,6.845 v1@3.58,6.845 ; S1.3@10.17,-1.309 11.493,-1.309 12.04,-0.762 v1(12.04,-0.711)
  Bottom4 w0.18: v1(3.617,6.882) 3.861,6.638 3.861,6.248 2.639,5.027 2.639,3.711 4.168,2.182 5.607,2.182 7.814,-0.025 8.179,-0.025 8.865,-0.711 v1(12.04,-0.711)
IN_AM: U1.2 U3.14 | length 17.5
  Top1 w0.3: v1(8.026,9.627) 8.549,10.149 U3.14 ; U1.2 16.853,17.014 16.853,15.835 v1(16.866,15.822)
  Bottom4 w0.3: v1(8.026,9.627) 7.984,9.627 7.905,9.705 7.846,9.705 7.442,10.109 7.442,13.107 10.236,15.9 13.49,15.9 13.569,15.822 v1(16.866,15.822)
IN_AP: U1.3 U3.15 | length 19.3
  Top1 w0.3: v1(6.985,9.931) 7.015,9.961 7.523,9.961 8.049,10.488 U3.15 ; v1(18.11,15.85) U1.3
  Bottom4 w0.3: v1(6.985,9.931) 6.985,13.411 9.876,16.302 17.302,16.302 17.753,15.852 18.108,15.852 v1(18.11,15.85)
IN_BM: U2.2 U3.12 | length 8.9
  Top1 w0.3: v1(9.271,12.37) 9.271,13.106 9.911,13.746 9.911,15.448 10.757,16.294 10.757,16.988 U2.2 ; v1(9.474,9.881) 9.493,9.862 U3.12
  Bottom4 w0.3: v1(9.271,12.37) 9.271,10.126 9.474,9.923 v1(9.474,9.881)
IN_BP: U2.3 U3.13 | length 7.6
  Top1 w0.3: U3.13 9.5,11.303 10.312,12.116 10.312,15.282 10.804,15.773 11.43,15.773 12.027,16.37 12.027,16.988 U2.3
IN_PWM_A: R1.1 U3.22 | length 1.5
  Top1 w0.254: U3.22 4.559,11.313 4.559,12.23 4.75,12.421 4.75,12.675 R1.1
IN_PWM_B: R6.1 U3.21 | length 2.9
  Top1 w0.254: U3.21 5.059,11.313 5.059,12.053 5.223,12.217 6.375,12.217 R6.1
MT6816_AUX_CS: U3.17
MT6816_CS: U3.38 U8.1 | length 20.4
  Top1 w0.18: U3.38 4.069,2.941 4.069,4.476 v1(4.115,4.521) ; v1(11.963,9.957) 12.294,10.287 14.98,10.287 15.773,11.08 15.773,13.737 15.951,13.914 15.951,14.273 v1(16.004,14.326)
  Bottom4 w0.18: v1(4.115,4.521) 4.14,4.496 6.49,4.496 11.951,9.957 v1(11.963,9.957) ; U8.1 15.928,14.905 16.076,14.757 15.982,14.757 15.982,14.347 v1(16.004,14.326)
NetC1_2: C1.2 R1.2 R2.1 | length 2
  Top1 w0.3: C1.2 R1.2 4.803,13.845 4.803,13.947 R2.1
NetC4_2: C4.2 R6.2 R7.1 | length 1.9
  Top1 w0.254: R7.1 6.248,14.046 C4.2 R6.2
NetC9_2: C9.2 R10.1 U3.7 | length 9.8
  Top1 w0.2: C9.2 R10.1 8.658,0.479 8.658,1.223 v4(8.782,1.347) ; v1(9.322,6.655) 9.371,6.704 9.371,6.933 9.78,7.342 10.47,7.342 U3.7
  Bottom4 w0.3: v4(8.782,1.347) 8.782,1.353 7.95,2.184 7.95,5.283 v1(9.322,6.655)
NetC12_1: C12.1 R19.2 U3.5 Y1.1 | length 7
  Top1 w0.18: U3.5 11.494,6.362 11.684,6.172 11.874,6.172 R19.2 11.989,6.077 12.339,6.426 14.366,6.426 15.157,5.635 Y1.1 15.591,5.944 C12.1
NetC13_1: C13.1 R19.1 U3.6 Y1.3 | length 7.1
  Top1 w0.2: U3.6 11.383,6.862 11.582,7.061 11.938,7.061 R19.1 13.065,7.093 Y1.3@13.557,7.585 ; Y1.3 Y1.3@13.557,7.585 ; C13.1 16.053,6.756 14.386,6.756 Y1.3@13.557,7.585
NetC15_1: C15.1 C17.1 D3.2 L1.1 U6.6
NetC15_2: C15.2 C17.2 U6.1
NetC16_2: C16.2 R13.1 R14.2 U6.3
NetC20_2: C20.2 D4.2 R15.1 U6.5
NetC23_2: C23.2 R21.1 U3.9 | length 2.8
  Top1 w0.3: U3.9 11.41,8.362 C23.2 12.039,8.991 12.344,8.991 R21.1
NetLED1_A: LED1.A R11.2 | length 1.8
  Top1 w0.16: LED1.A 3.912,-3.35 4.572,-2.69 4.572,-2.032 R11.2
NetLED2_A: LED2.A R18.2 | length 1.5
  Top1 w0.16: R18.2 21.615,-3 LED2.A
NetR3_1: R3.1 U1.7 | length 1.9
  Top1 w0.5: U1.7 v2@16.84,23.266
  Bottom4 w0.5: R3.1@16.846,24.232 16.856,24.222 16.856,23.276 v2(16.866,23.266)
NetR8_1: R8.1 U2.7 | length 2.2
  Top1 w0.5: v2@10.414,23.216 v2(10.414,23.19) 10.414,23.108 10.795,22.727 U2.7
  Bottom4 w0.5: R8.1@10.256,24.232 10.395,24.093 10.395,23.209 v2(10.414,23.19)
NetR9_1: R9.1 U3.44 | length 1.9
  Top1 w0.2: R9.1@6.756,1.168 6.894,1.306 6.894,1.424 6.909,1.44 6.909,1.651 7.049,1.791 U3.44
NetR12_2: R12.2 S1.4 | length 1.9
  Top1 w0.2: R12.2 8.651,-2.337 8.93,-2.616 S1.4
NetR15_2: R15.2 U6.4 | length 2
  Top1 w0.3: U6.4 23.908,8.855 24.106,9.053 24.106,9.34 24.458,9.691 24.458,10.208 R15.2
OUT_A+: U1.6 | length 7.8
  Top1 w1: U1.6 18.11,23.419 21.424,26.732 21.424,28.542 v3(21.539,28.657)
OUT_A-: U1.8 | length 8.6
  Top1 w1: U1.8@15.57,22.477 15.57,23.927 16.51,24.867 17.831,24.867 19.424,26.46 19.424,28.542 v3(19.539,28.657)
OUT_B+: U2.6 | length 10.3
  Top1 w1: v3(6.146,28.657) 6.146,28.495 7.675,26.966 7.675,25.912 8.822,24.765 11.405,24.765 12.116,24.054 12.116,22.377 U2.6
OUT_B-: U2.8 | length 9.1
  Top1 w1: v3(4.146,28.657) 4.242,28.562 4.242,26.806 5.495,25.552 6.477,25.552 9.525,22.504 U2.8
PC13: R11.1 U3.2 | length 23.6
  Top1 w0.16: R11.1 v1(5.258,-0.889) ; U3.2 v1(11.796,4.862) v1@11.811,4.877
  Bottom4 w0.16: v1(5.258,-0.889) 5.258,-1.524 6.35,-2.616 10.033,-2.616 11.481,-1.168 12.217,-1.168 12.564,-0.822 12.564,0.946 11.681,1.829 11.532,1.829 11.405,1.956 9.373,1.956 8.509,2.819 8.509,5.105 8.915,5.512 11.146,5.512 v1(11.796,4.862)
PC14: R18.1 U3.3 | length 14.9
  Top1 w0.16: U3.3 12.173,5.362 13.065,4.47 15.735,4.47 17.12,3.086 17.12,2.388 17.45,2.057 19.736,2.057 21.615,0.178 R18.1
PC15: U3.4
PGND: C11.2 C27.1 C28.1 C29.2 C30.2 C31.2 C32.2 D2.1 P1.5 P1.6 P2.5 P2.6 R3.2 R8.2 R20.2 U1.1 U1.9 U2.1 U2.9
  other v1: 6.883,16.459 3.835,16.561 6.909,17.297 3.937,17.399 6.858,18.009 3.937,18.186 6.934,18.669 3.988,18.872
  other v2: 10.637,18.954 11.475,18.954 12.313,18.954 16.656,18.98 17.495,18.98 18.333,18.98 10.637,20.021 11.449,20.021 12.262,20.021 16.656,20.047 17.469,20.047 18.282,20.047
POWER_U: U3.10
SPI1_MISO: U3.40 U8.6 | length 13.6
  Top1 w0.18: U3.40 5.049,3.881 5.766,4.597 5.766,5.156 v1(6.274,5.664)
  Bottom4 w0.18: v1(6.274,5.664) 8.865,8.255 8.865,10.228 8.384,10.708 8.384,12.37 8.804,12.79 9.31,12.79 9.322,12.802 9.513,12.802 9.95,12.365 U8.6
SPI1_MOSI: U3.41 U8.5 | length 10.3
  Top1 w0.18: U3.41 5.549,3.924 6.274,4.648 v1(6.274,4.978)
  Bottom4 w0.18: v1(6.274,4.978) 10.04,8.745 10.04,11.025 10.11,11.095 U8.5
SPI1_SCK: U3.39 U8.7 | length 14.2
  Top1 w0.18: U3.39 4.549,4.117 5.309,4.877 5.309,5.385 v1(6.35,6.426)
  Bottom4 w0.18: v1(6.35,6.426) 8.583,8.659 8.583,10.111 8.103,10.592 8.103,12.487 8.699,13.083 9.398,13.083 9.95,13.635 U8.7
SPI2_MISO: U3.27
SPI2_MOSI: U3.28
SPI2_SCK: U3.26
SWCLK: P3.2 U3.37 | length 16
  Top1 w0.2: P3.2 -1.012,14.324 -2.057,13.279 -2.057,6.121 0.102,3.962 1.448,3.962 2.056,3.354 3.501,3.354 3.549,3.306 U3.37
SWDIO: P3.3 U3.34 | length 15
  Top1 w0.2: P3.3 -0.512,15.824 0.24,15.073 0.24,11.873 -1.092,10.541 -1.092,5.69 -0.305,4.902 1.114,4.902 1.574,5.362 U3.34
TEMP: C3.2 R4.1 R5.2 U3.11 | length 16.5
  Top1 w0.152: R4.1 14.548,17.557 14.828,17.557 15.113,17.272 15.113,16.479 15.463,16.129 15.507,16.129 15.786,15.85 16.129,15.85 C3.2 R5.2
  Top1 w0.18: U3.11 12.041,9.362 12.407,9.728 12.407,9.759 12.654,10.005 15.187,10.005 16.256,11.074 16.256,11.633 18.276,13.654 18.276,14.54 18.263,14.554 18.263,14.63 R5.2
UART1_RX: P3.6 U3.43 | length 22.6
  Top1 w0.2: P3.6 -0.756,20.324 -0.236,19.805 -0.236,19.798 0.991,18.572 0.991,11.125 1.27,10.846 2.743,10.846 5.411,8.178 6.503,8.178 6.604,8.077 7.315,7.366 7.315,4.679 6.549,3.913 U3.43
UART1_TX: P3.5 U3.42 | length 21.6
  Top1 w0.2: P3.5 0.276,18.824 0.66,18.44 0.66,12.675 0.686,12.649 0.686,10.998 1.14,10.544 2.613,10.544 5.281,7.877 6.378,7.877 7.014,7.241 7.014,4.804 6.049,3.839 U3.42
USB_DM: U3.32
USB_DP: U3.33
VCC: C11.1 C27.2 C28.2 C29.1 C30.1 C31.1 C32.1 D1.2 D2.2 D4.1 U1.5 U2.5
  other v1: 21.717,15.545 21.107,15.596 20.777,16.129 20.701,17.018 20.701,17.78 13.36,21.031 19.917,21.06 6.528,21.082 19.202,21.082 3.988,21.107 4.699,21.107 5.486,21.133 7.087,21.412 19.583,21.488 13.894,21.514 3.785,21.717 7.137,22.073 14.173,22.073 3.962,22.504 6.96,22.86 4.115,23.089
VCC_3V3: C6.2 C7.2 C8.2 C10.2 C21.2 C22.2 C24.2 C25.2 C36.2 R4.2 R10.2 R21.2 T2.0 U3.1 U3.24 U3.36 U3.48 U5.3 U7.5 U8.2 U8.4 | length 22.9
  Top1 w0.2: R4.2 15.113,15.977 15.113,15.951 15.699,15.365 15.699,15.362 15.72,15.342 16.078,15.342 16.434,14.986 16.434,13.513 16.579,13.368 v1(16.579,13.147)
  Top1 w0.35: C8.2 4.572,1.27 v1(5.105,1.27) ; v1(8.534,-1.194) R10.2 ; U3.48 9.049,3 9.072,3.023 C10.2 ; v1@10.135,2.362 v1(10.16,2.388) C10.2 ; C6.2 11.961,4.067 11.453,4.067 11.176,4.343 10.509,4.343 U3.1 10.183,4.362 10.16,4.339 C10.2 ; R21.2 v1(14.402,9.5)
  Top1 w0.39: v1(0.787,4.394) 0.82,4.362 U3.36 ; v1@2.769,12.09 C7.2 2.828,11.549 3.507,11.549 3.549,11.506 U3.24 ; v1(14.732,2.057) 14.732,2.076 14.884,2.228 C36.2
  Bottom4 w0.35: U8.4 16.091,11.095 16.578,11.582 16.637,11.582 16.739,11.684 C25.2 ; U8.2 16.091,13.635 v1(16.579,13.147) 16.825,13.147 C24.2 C25.2 ; v1(17.272,10.744) 17.272,10.773 17.399,10.9 C25.2
  Bottom4 w0.39: v1(14.732,2.057) U5.3@14.732,2.565
  other v1: 17.018,10.033 17.729,10.185 16.637,10.439 2.769,12.065
VCC_5V: C16.1 C18.2 C19.2 L1.2 R13.2 U7.1 U7.3 | length 10.4
  Top1 w0.3: v1(28.016,4.14) 28.042,4.166 R13.2 C16.1
  Bottom4 w0.3: v2(21.514,4.547) 21.92,4.14 v1(28.016,4.14)
  other v2: 20.777,4.547 20.345,5.131
VCC_IN: D1.1 P1.1 P1.2 P2.1 P2.2
VREF_A: C2.2 R2.2 U1.4 | length 20
  Top1 w0.254: R2.2 C2.2 4.089,15.088 7.671,15.088 v1(7.772,15.189)
  Top1 w0.3: v1(19.355,15.9) 19.367,15.913 19.367,17.014 U1.4
  Bottom4 w0.3: v1(7.772,15.189) 7.772,15.232 8.174,15.634 8.174,15.958 9.321,17.105 12.432,17.105 12.929,17.602 14.148,17.602 14.961,16.789 18.059,16.789 18.948,15.9 v1(19.355,15.9)
VREF_B: C5.2 R7.2 U2.4 | length 8.4
  Top1 w0.3: R7.2 C5.2 8.721,15.147 8.684,15.184 8.684,15.73 v1(8.654,15.76) ; U2.4 13.365,16.997 13.737,16.997 v1(13.767,16.967)
  Bottom4 w0.3: v1(8.654,15.76) 9.598,16.704 12.69,16.704 12.954,16.967 v1(13.767,16.967)
pads on no net: U3.18 U3.19 U5.5 U5.8 U7.4 U8.3 Y1.2 Y1.4
copper on no net: | length 22.1
  Bottom4 w0.254: 29.518,0 ccw(c26,0) 29.518,0

## Polygon pours and split planes (outlines as drawn)
VCC on Top1 "VCC_L01_P092" (solid, pour order 92): 18.466,15.367 20.574,15.367 20.853,15.088 20.853,13.767 20.726,13.64 18.415,13.64 18.288,13.767 18.288,15.189
PGND on Top1 "PGND_L01_P106" (solid, pour order 106): 21.006,12.09 21.006,13.386 22.098,14.478 24.74,14.478 25.222,14.961 28.169,14.961 28.245,14.884 28.245,11.278 28.27,11.252 27.915,10.897 21.209,10.897 21.031,11.074 21.031,12.065
NetC20_2 on Top1 "NETC20_2_L01_P093" (solid, pour order 93): 19.71,13.056 19.71,10.77 19.99,10.49 22.758,10.49 22.936,10.668 23.948,10.668 24.054,10.562 24.054,9.728 23.851,9.525 22.987,9.525 22.758,9.296 22.758,8.484 22.885,8.357 24.333,8.357 24.486,8.204 24.486,7.468 24.435,7.417 22.733,7.417 22.276,7.874 20.637,7.874 20.142,8.369 20.142,9.398 19.787,9.754 18.339,9.754 18.059,10.033 18.059,12.954 18.237,13.132 19.634,13.132
VCC_5V on Top1 "VCC_5V_L01_P098" (solid, pour order 98): 20.142,5.918 22.377,5.918 22.53,5.766 22.53,3.988 21.895,3.353 20.142,3.353 19.964,3.531 19.964,5.74
NetC16_2 on Top1 "NETC16_2_L01_P096" (solid, pour order 96): 25.019,9.601 25.222,9.804 29.616,9.804 29.743,9.677 29.743,6.325 29.718,6.299 28.804,6.299 28.651,6.452 28.651,9.119 28.55,9.22 27.178,9.22 27.051,9.093 27.051,8.509 26.975,8.433 25.197,8.433 25.019,8.611 25.019,8.687
GND on Top1 "GND_L01_P095" (solid, pour order 95): 17.704,9.627 17.348,9.271 17.348,2.718 17.678,2.388 22.047,2.388 22.301,2.642 22.987,2.642 23.851,3.505 24.765,3.505 25.121,3.861 27.356,3.861 27.686,4.191 27.686,8.179 27.483,8.382 25.222,8.382 25.095,8.255 25.095,7.62 25.197,7.518 26.797,7.518 26.949,7.366 26.949,6.274 26.518,5.842 25.629,5.842 25.324,5.537 25.324,4.42 25.044,4.14 22.936,4.14 21.996,3.2 20.066,3.2 19.837,3.429 19.837,5.321 19.672,5.486 18.567,5.486 18.313,5.74 18.313,7.62 18.542,7.849 19.583,7.849 19.761,8.026 19.761,9.525 19.66,9.627 19.355,9.627
VCC on Top1 "VCC_L01_P091" (solid, pour order 91): 23.52,18.11 23.622,18.009 23.622,15.088 23.419,14.884 20.168,14.884 20.041,15.011 20.041,17.983 20.168,18.11 20.523,18.11
NetC15_1 on Top1 "NETC15_1_L01_P073" (solid, pour order 73): 23.089,4.851 22.758,5.182 22.758,6.045 22.581,6.223 18.796,6.223 18.491,6.528 18.491,7.518 18.694,7.722 20.752,7.722 20.955,7.518 22.25,7.518 22.454,7.315 24.282,7.315 24.384,7.214 24.384,6.274 23.876,5.766 23.876,4.267 23.8,4.191 23.292,4.191 23.089,4.394
PGND on Top1 "PGND_L01_P088" (solid, pour order 88): 7.849,19.456 7.849,20.345 7.976,20.472 20.32,20.472 20.422,20.371 20.422,18.415 20.32,18.313 16.129,18.313 16.027,18.212 16.027,16.281 15.875,16.129 15.138,16.129 14.961,16.307 14.961,18.186 14.808,18.339 10.135,18.339 10.033,18.237 10.033,16.307 9.855,16.129 7.696,16.129 7.595,16.231 7.798,16.434 7.798,19.406
PGND on Top1 "PGND_L01_P090" (solid, pour order 90): 14.58,27.483 17.577,27.483 17.628,27.432 17.628,25.959 17.348,25.679 16.027,25.679 14.58,24.232 12.954,24.232 12.725,24.46 12.725,25.273 12.878,25.425 14.326,25.425 14.478,25.578 14.478,27.381
PGND on Top1 "PGND_L01_P089" (solid, pour order 89): 21.59,23.419 21.717,23.292 21.717,20.65 21.539,20.472 20.244,20.472 20.193,20.422 20.193,18.44 20.32,18.313 22.377,18.313 22.758,18.694 22.758,24.105 22.403,24.46 20.32,24.46 20.041,24.181 20.041,23.444 20.066,23.419
PGND on Top1 "PGND_L01_P083" (solid, pour order 83): 2.921,19.456 7.849,19.456 7.976,19.329 7.976,15.951 7.645,15.621 3.073,15.621 2.591,16.104 2.591,19.126
VCC on Top1 "VCC_L01_P081" (solid, pour order 81): 3.632,24.486 6.274,24.486 7.518,23.241 7.518,20.091 7.391,19.964 3.099,19.964 2.616,20.447 2.616,22.936 3.632,23.952 3.632,24.511
NetC15_2 on Top1 "NETC15_2_L01_P074" (solid, pour order 74): 23.952,5.486 23.952,5.639 24.714,6.401 24.714,7.112 25.019,7.417 26.746,7.417 26.848,7.315 26.848,6.477 26.695,6.325 25.603,6.325 25.019,5.74 25.019,4.369 24.917,4.267 24.028,4.267 23.952,4.343 23.952,5.626 24.041,5.715
VCC_3V3 on Signal2 "VCC_3V3_L02_P110" (solid, pour order 110): -4.547,22.225 1.118,22.225 1.499,21.844 1.499,15.342 1.676,15.164 7.112,15.164 8.179,16.231 19.66,16.231 20.879,15.011 20.879,10.719 21.133,10.465 28.854,10.465 28.981,10.338 28.981,3.835 28.499,3.353 24.13,3.353 22.784,2.007 17.069,2.007 16.311,1.249 10.19,1.249 9.246,0.305 9.246,-4.547 3.581,-4.547 2.896,-3.861 2.896,1.93 0.711,4.115 -4.597,4.115 -4.597,22.174
PGND on Signal2 "PGND_L02_P108" (solid, pour order 108): 8.018,20.549 21.514,20.549 21.793,20.269 21.793,18.618 21.488,18.313 8.128,18.313 7.957,18.484
VCC_IN on Signal2 "VCC_IN_L02_P076" (solid, pour order 76): 8.331,24.282 8.331,24.206 8.763,23.774 18.771,23.774 24.435,18.11 28.321,18.11 28.608,18.397 28.608,22.065 28.423,22.25 24.613,22.25 21.387,25.476 11.684,25.476 11.455,25.705 11.455,28.804 11.074,29.185 8.763,29.185 8.28,28.702 8.28,24.333
GND on Gnd3 "GND_L03_P109" (solid, pour order 109): -4.47,22.225 1.194,22.225 1.575,21.844 1.575,15.342 1.753,15.164 7.188,15.164 8.255,16.231 19.736,16.231 20.955,15.011 20.955,10.719 21.209,10.465 28.931,10.465 29.058,10.338 29.058,3.835 28.575,3.353 24.206,3.353 22.86,2.007 17.145,2.007 16.387,1.249 10.266,1.249 9.322,0.305 9.322,-4.547 3.658,-4.547 2.972,-3.861 2.972,1.93 0.787,4.115 -4.521,4.115 -4.521,22.174
PGND on Gnd3 "PGND_L03_P107" (solid, pour order 107): 8.128,20.523 23.317,20.523 23.597,20.244 23.597,18.415 23.495,18.313 8.128,18.313 7.95,18.491 7.95,20.396 8.103,20.549
PGND on Gnd3 "PGND_L03_P077" (solid, pour order 77): 14.453,23.978 14.63,23.8 18.872,23.8 23.343,19.329 23.343,12.2 24.219,11.324 29.104,11.324 29.616,11.836 29.616,14.554 29.235,14.935 25.959,14.935 25.425,15.469 25.425,21.438 19.38,27.483 18.72,27.483 18.186,28.016 18.186,28.677 17.805,29.058 17.805,29.108 14.834,29.108 14.453,28.727 14.453,25.654
PGND on Bottom4 "PGND_L04_P104" (solid, pour order 104): 26.01,15.037 23.571,15.037 23.419,14.884 23.419,11.405 23.571,11.252 28.27,11.252 28.473,11.455 28.473,14.656 28.143,14.986 26.086,14.986 26.01,15.062
VCC_3V3 on Bottom4 "VCC_3V3_L04_P103" (solid, pour order 103): 18.339,8.915 18.339,9.55 18.11,9.779 16.281,9.779 16.053,10.008 16.053,10.541 16.561,11.049 19.025,11.049 19.685,10.389 21.184,10.389 21.387,10.185 21.387,8.763 21.234,8.611 18.644,8.611
VCC_5V on Bottom4 "VCC_5V_L04_P102" (solid, pour order 102): 24.257,8.687 24.435,8.509 24.435,7.671 24.206,7.442 22.911,7.442 21.311,5.842 20.117,5.842 19.888,5.613 19.888,4.293 20.168,4.013 22.149,4.013 22.504,4.369 22.504,4.851 24.943,7.29 24.943,8.855 24.282,9.516 22.996,9.516 22.987,9.525 22.758,9.296 22.758,8.839 22.911,8.687
GND on Bottom4 "GND_L04_P101" (solid, pour order 101): 18.669,8.509 18.491,8.509 18.11,8.89 18.11,9.423 18.059,9.474 17.348,9.474 17.145,9.271 17.145,7.391 17.45,7.087 19.329,7.087 19.685,7.442 19.583,7.544 19.583,8.204 18.974,8.204
GND on Bottom4 "GND_L04_P100" (solid, pour order 100): 24.181,8.509 24.333,8.357 24.333,7.696 24.206,7.569 18.491,7.569 18.263,7.798 18.263,8.213 18.559,8.509 18.961,8.509
VCC on Bottom4 "VCC_L04_P085" (solid, pour order 85): 22.276,22.657 22.835,22.657 24.155,21.336 24.155,15.545 23.876,15.265 20.676,15.265 20.422,15.519 20.422,17.856 20.549,17.983 22.557,17.983 22.733,18.159 22.733,20.168 21.869,21.031 21.869,21.996 21.895,22.022
PGND on Bottom4 "PGND_L04_P082" (solid, pour order 82): 22.098,20.447 22.276,20.269 22.276,18.542 22.098,18.364 8.255,18.364 8.077,18.186 8.077,16.535 7.163,15.621 3.454,15.621 2.972,16.104 2.972,19.939 3.48,20.447
VCC on Bottom4 "VCC_L04_P080" (solid, pour order 80): 4.479,23.492 8.969,23.492 9.804,22.657 22.276,22.657 22.403,22.53 22.403,20.93 22.174,20.701 3.48,20.701 3.15,21.031 3.15,23.114 3.505,23.47 4.456,23.47
VCC_IN on Bottom4 "VCC_IN_L04_P079" (solid, pour order 79): 11.354,25.552 8.357,25.552 8.204,25.4 8.204,24.333 7.95,24.079 4.343,24.079 4.115,24.308 4.115,27.28 4.394,27.559 11.151,27.559 11.354,27.356 11.354,25.578
PGND on Bottom4 "PGND_L04_P078" (solid, pour order 78): 12.116,23.368 12.116,25.095 12.471,25.451 14.275,25.451 14.554,25.73 14.554,27.711 14.834,27.991 17.602,27.991 17.882,27.711 17.882,25.603 17.704,25.425 15.926,25.425 15.265,24.765 15.265,23.571 14.91,23.216 12.268,23.216

## Keep-outs
Keep-Out Layer:
  lines w0.254: -0.003,30.511 25.959,30.511 ; 0.048,-4.516 26.01,-4.516

## Other copper
Top1:
  rectangle net GND: 27.635,8.484 28.423,9.093
  rectangle net GND: 27.356,8.179 27.762,9.093
  rectangle net VCC: 18.999,20.853 21.361,23.241
  rectangle net VCC: 12.852,20.701 14.503,24.079
  pour cut-out: 10.947,15.242 10.947,10.615 14.935,10.615 14.935,15.242
  text "L1" at -3.916,2.637 h0.99
Signal2:
  pour cut-out: 10.795,15.443 10.795,10.363 15.367,10.363 15.367,15.443
  text "L2" at -3.993,2.992 h0.99
Gnd3:
  pour cut-out: 10.714,15.5 10.714,10.42 15.286,10.42 15.286,15.5
  text "L3" at -3.916,2.637 h0.99
Bottom4:
  rectangle net PGND: 3.302,18.364 22.047,20.371
  pour cut-out: 10.77,15.545 10.77,10.465 15.342,10.465 15.342,15.545
  text "L4" at -3.891,2.865 h0.99

## Silkscreen, mask and mechanical layers (free items; w line width, h text height)
Top Overlay:
  lines w0.254: 24.409,4.496 24.633,4.272 26.564,4.272 26.187,4.648 27.61,4.648
  text "+" at 6.35,30.607 h5.08 r270
  text "24V" at 10.042,28.579 h1.8
  text "IN" at 13.623,27.656 h2
  text "B-B+" at 3.676,24.34 h1.5
  text "A-A+" at 18.725,24.276 h1.5
  text "+" at 27.254,22.835 h5.08 r270
  text "24V" at 28.579,19.346 h1.8 r270
  text "SCLK DIO" at -1.657,10.414 h1.14 r90
Bottom Overlay:
  text "Designed by            MUZI XIAOWEN" at 15.629,5.106 h2
Bottom Solder:
  rectangle: 3.302,18.364 22.047,20.371
Mechanical 1:
  lines w0.254: -4.551,26.06 -4.551,26.564 cw(c-1.485,26.564) -3.653,28.732 -2.723,29.662 cw(c-0.555,27.494) -0.555,30.56 -0.051,30.56 ; -4.5,26 -4.5,0 -4.5,-0.504 ccw(c-1.434,-0.504) -3.602,-2.672 -2.672,-3.602 ccw(c-0.504,-1.434) -0.504,-4.5 0,-4.5 ; -0.003,30.511 25.984,30.511 ; 0.048,-4.516 25.908,-4.516 ; 25.984,-4.525 26.405,-4.525 ; 25.984,30.51 26.488,30.51 cw(c26.488,27.444) 28.656,29.612 29.586,28.681 cw(c27.418,26.513) 30.484,26.513 30.484,26.01 ; 26.405,-4.551 ccw(c26.405,-1.22) 28.76,-3.575 29.612,-2.748 ccw(c27.444,-0.58) 30.51,-0.58 30.51,-0.076 30.51,25.984

## Text inside footprints (layer, text, board x,y; h text height)
S1: Top Overlay "ON" at 13.582,-2.205 h0.33; Top Overlay "1" at 15.821,-2.503 h0.52 r90; Top Overlay "ON" at 13.582,1.859 h0.33; Top Overlay "ON" at 13.582,0.335 h0.33; Top Overlay "1" at 15.821,0.037 h0.52 r90; Top Overlay "2" at 15.721,1.611 h0.52 r90